# Allegro board D1_CORE.brd
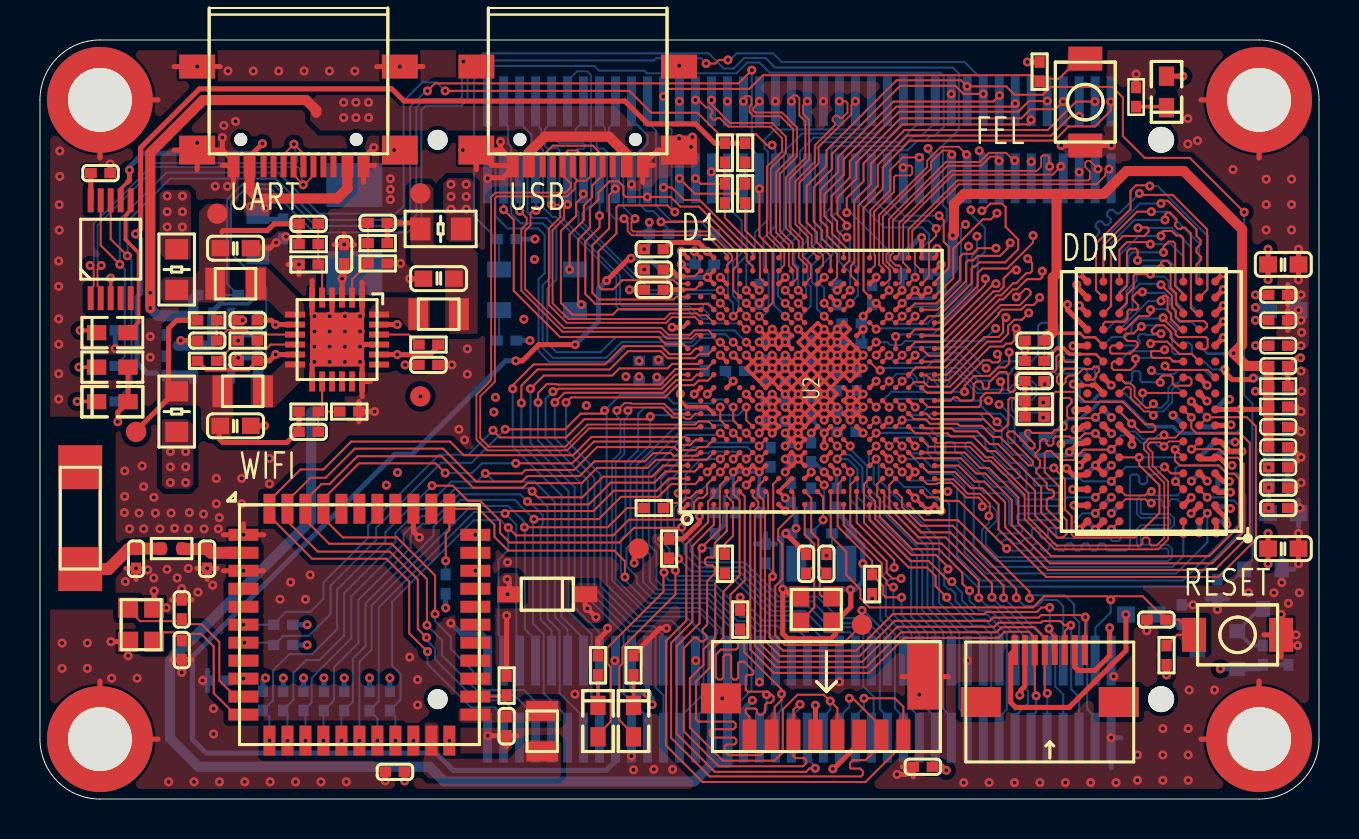
[diagram p0: board, top side]
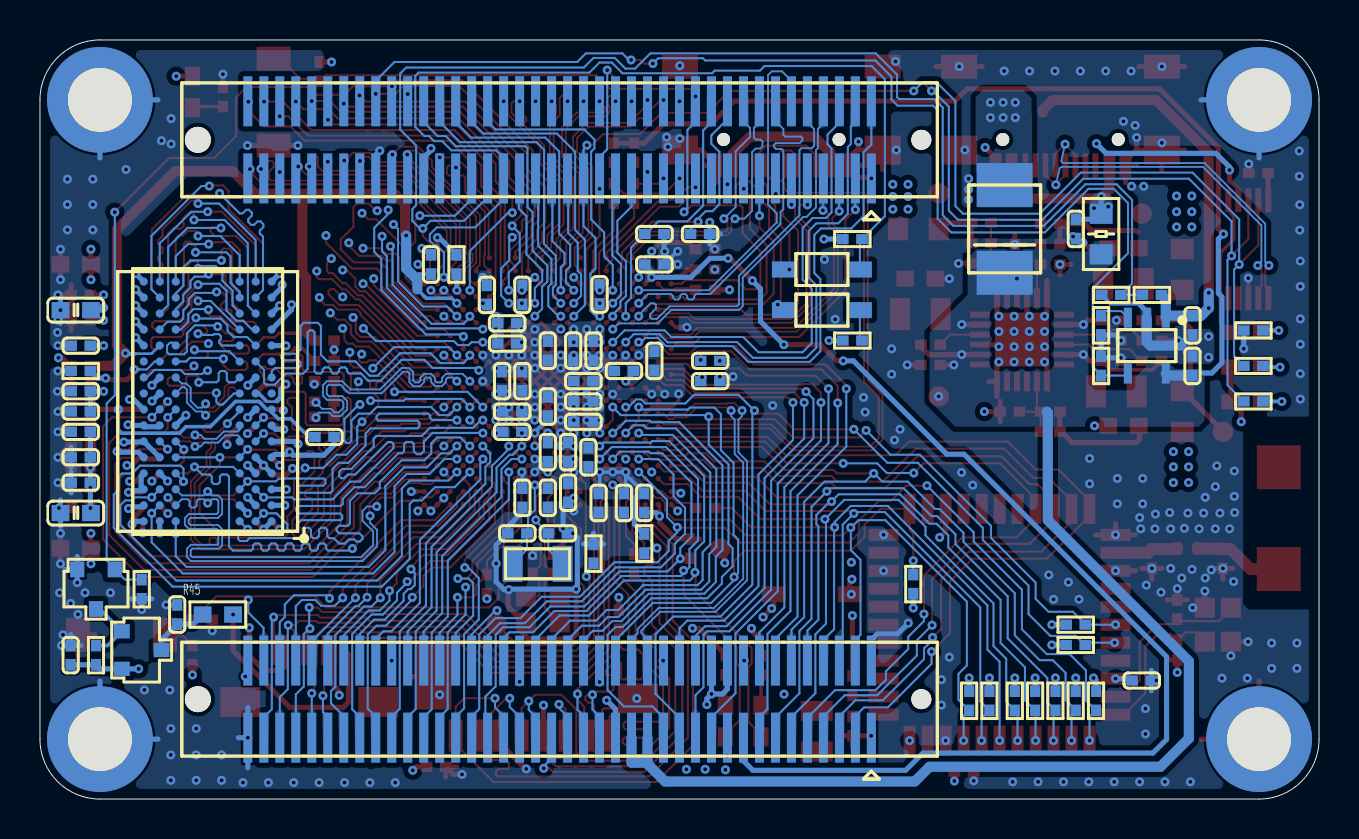
[diagram p1: board, bottom side, seen from below]

Outline 64 x 38 mm; copper layers: TOP, GND, POWER, BOTTOM. Coordinates in mm from the lower left corner of the outline.
Outline path: 0,35 0,3 arc(0.88,0.88) 3,0 61,0 arc(63.12,0.88) 64,3 64,35 arc(63.12,37.12) 61,38 3,38 arc(0.88,37.12) 0,35

## Design rules (mm)
constraint set DEFAULT: min track width 0.102
net group DSI_CK: nets DSI_CKN DSI_CKP
net group DSI_D0: nets DSI_DN0 DSI_DP0
net group DSI_D1: nets DSI_DN1 DSI_DP1
net group DSI_D2: nets DSI_DN2 DSI_DP2
net group DSI_D3: nets DSI_DN3 DSI_DP3
net group HDMI_0: nets HDMI_0N HDMI_0P
net group HDMI_1: nets HDMI_1N HDMI_1P
net group HDMI_2: nets HDMI_2N HDMI_2P
net group HDMI_C: nets HDMI_CN HDMI_CP
net group LINEOUTL: nets LINEOUTL_N LINEOUTL_P
net group MIC_IN1_C: nets MIC_IN1_C_N MIC_IN1_C_P
net group MIC_IN2_C: nets MIC_IN2_C_N MIC_IN2_C_P
net group MIC_IN3_C: nets MIC_IN3_C_N MIC_IN3_C_P
net group SDC0_CLK: nets N650031 SDC0_CLK
net group DDR_CTL: nets DDR_CKE0 DDR_CS0_B DDR_ODT0
net group DDR_DQS0: nets DDR_DQS0_N
net group DDR_DQS1: nets DDR_DQS1_N
net group POWER: nets V3 VERF VLDO_BOUT

## Placement (name value [footprint] x y rotation side)
C1  10uf  [C0402]  10.4 23.97 180 top
C2  10uf  [C0402]  15.22 27.27 90 top
C3  10uf  [C0402]  10.4 21.94 180 top
C4  10uf  [C0402]  19.44 21.73 0 top
C5  0.1uf  [C0402]  13.44 18.38 0 top
C6  22uf  [C0603]  9.79 18.68 0 top
C7  10uf  [C0402]  8.36 22.95 180 top
C8  0.1uf  [C0402]  13.44 28.79 0 top
C9  22uf  [C0603]  9.79 27.57 0 top
C10  0.1uf  [C0402]  16.9 28.84 180 top
C11  22uf  [C0603]  19.95 26.05 180 top
C12  12pf  [C0402]  38.08 13.3 0 bottom
C13  12pf  [C0402]  40.11 13.3 180 bottom
C14  12pf  [C0402]  38.34 11.78 270 top
C15  1uf  [C0402]  55.86 8.98 180 top
C16  12pf  [C0402]  39.35 11.78 270 top
C17  1uf  [C0402]  40.37 18.38 0 bottom
C18  10uf  [C0402]  30.46 20.92 180 bottom
C19  1uf  [C0402]  36.81 19.9 0 bottom
C20  10uf  [C0402]  36.56 17.11 90 bottom
C21  1uf  [C0402]  38.59 19.65 90 bottom
C22  1uf  [C0402]  36.81 18.89 0 bottom
C23  0.1uf  [C0402]  36.81 20.92 0 bottom
C24  10uf  [C0402]  30.46 21.94 180 bottom
C25  1uf  [C0402]  36.3 22.44 270 bottom
C26  1uf  [C0402]  37.57 15.33 270 bottom
C27  1uf  [C0402]  37.57 17.36 90 bottom
C28  1uf  [C0402]  38.59 17.36 270 bottom
C29  1uf  [C0402]  37.32 22.44 270 bottom
C30  0.1uf  [C0402]  38.59 22.44 270 bottom
C31  1uf  [C0402]  38.59 15.08 270 bottom
C32  1uf  [C0402]  36 25.26 90 bottom
C33  0.1uf  [C0402]  40.62 22.8 180 bottom
C34  0.1uf  [C0402]  61.96 21.68 180 top
C35  10uf  [C0402]  39.86 20.92 90 bottom
C36  1uf  [C0402]  40.88 20.92 90 bottom
C37  0.1uf  [C0402]  40.37 19.4 180 bottom
C38  0.1uf  [C0402]  61.96 17.62 0 top
C39  0.1uf  [C0402]  49.77 18.13 180 bottom
C40  0.1uf  [C0402]  44.43 26.76 90 bottom
C41  0.1uf  [C0402]  61.96 18.63 0 top
C42  0.1uf  [C0402]  49.77 22.95 180 top
C43  0.1uf  [C0402]  49.77 20.92 0 top
C44  22uf  [C0603]  62.21 14.32 0 bottom
C45  10uf  [C0603]  62.21 24.48 0 bottom
C46  1uf  [C0402]  61.96 22.7 0 bottom
C47  1uf  [C0402]  61.96 17.11 0 bottom
C48  1uf  [C0402]  61.96 15.84 0 bottom
C49  0.1uf  [C0402]  61.96 19.4 0 bottom
C50  0.1uf  [C0402]  61.96 18.38 0 bottom
C51  0.1uf  [C0402]  61.96 20.41 0 bottom
C52  22uf  [C0603]  62.21 26.76 0 top
C53  10uf  [C0603]  62.21 12.54 0 top
C54  1uf  [C0402]  61.96 25.24 0 top
C55  1uf  [C0402]  61.96 23.97 0 top
C56  1uf  [C0402]  61.96 14.57 0 top
C57  0.1uf  [C0402]  61.96 22.7 0 top
C58  0.1uf  [C0402]  61.96 16.6 0 top
C59  0.1uf  [C0402]  61.96 15.59 0 top
C60  0.1uf  [C0402]  33.76 14.82 270 bottom
C61  0.1uf  [C0402]  36.05 14.82 270 bottom
C62  0.1uf  [C0402]  34.78 14.82 270 bottom
C63  0.1uf  [C0402]  41.64 25.24 90 bottom
C64  0.1uf  [C0402]  40.62 23.82 180 bottom
C65  0.1uf  [C0402]  44.18 1.62 180 top
C66  0.1uf  [C0402]  39.86 15.08 270 bottom
C67  0.1uf  [C0402]  30.72 27.52 0 top
C68  1uf  [C0402]  33.26 26.76 0 bottom
C69  10uf  [C0402]  30.72 26.51 0 top
C70  1uf  [C0402]  30.72 25.49 0 top
C71  0.1uf  [C0402]  33.26 28.29 180 bottom
C72  0.1uf  [C0402]  33.26 21.94 90 bottom
C73  1uf  [C0402]  34.78 21.43 180 bottom
C74  0.1uf  [C0402]  30.97 28.29 180 bottom
C75  0.1uf  [C0402]  39.86 25.24 90 bottom
C76  1uf  [C0402]  62.47 7.2 90 bottom
C77  1uf  [C0402]  57.13 9.24 90 bottom
C78  0.1uf  [C0402]  6.33 21.68 270 bottom
C79  0.1uf  [C0402]  6.33 23.71 90 bottom
C80  0.1uf  [C0402]  12.17 28.54 90 bottom
C81  0.1uf  [C0402]  3.03 31.33 180 top
C82  10pf  [C0402]  8.36 12.03 90 top
C83  10pf  [C0402]  4.81 12.03 90 top
C84  1uf  [C0402]  17.76 1.36 0 top
C85  1uf  [C0402]  8.87 5.93 0 bottom
C86  1uf  [C0402]  23.35 3.65 90 top
C87  12pf  [C0402]  7.09 9.49 90 top
C88  12pf  [C0402]  7.09 7.46 270 top
D1  LED  [LED0603]  56.37 35.4 90 top
D2  DIODE  [SOD-123]  25.38 10.25 180 top
D3  SS24  [SMB-403A-03]  15.73 28.54 90 bottom
D4  LED  [LED0603]  27.92 3.9 270 top
D5  LED  [LED0603]  29.7 3.9 270 top
D6  DIODE  [SOD-123]  24.87 24.48 180 bottom
D7  DIODE  [SOD-123]  24.87 26.51 180 bottom
D8  LED  [LED0603]  3.62 21.62 0 top
D9  LED  [LED0603]  3.62 19.89 0 top
D10  LED  [LED0603]  3.62 23.35 0 top
J1  TP  [TEST-POINT]  4.81 18.38 0 top
J2  TP  [TEST-POINT]  8.87 29.3 0 top
J3  TP  [TEST-POINT]  19.03 30.32 0 top
J4  TP  [TEST-POINT]  19.03 20.16 0 top
J5  M3  [M3-PAD]  61 3 0 top
J6  M3  [M3-PAD]  61 35 0 top
J7  M3  [M3-PAD]  3 3 0 top
J8  TP  [TEST-POINT]  29.95 12.54 0 top
J9  M3  [M3-PAD]  3 35 0 top
J10  TP  [TEST-POINT]  41.13 8.73 0 top
J11  -  [TFCARD-SHORT-8P]  39.35 2.38 0 top
J12  USB-C-16P  [USB-C-16P-SMD]  26.91 36.67 180 top
J13  USB-C-16P  [USB-C-16P-SMD]  12.94 36.67 180 top
J15  HEADER 40x2  [BTB-80P-0P8MM-MALE]  38 33 270 bottom
J16  HEADER 40x2  [BTB-80P-0P8MM-MALE]  38 5 270 bottom
L1  1.5uh  [L0806]  10.14 20.41 180 top
L2  1.5uh  [L0806]  9.79 25.8 180 top
L3  1.5uh  [L0806]  19.95 24.27 0 top
L4  0  [L0402]  6.59 12.54 0 top
L5  1uh  [L0806]  25.13 3.39 90 top
NOREF  -  []  38 33 0 top
NOREF#2  -  []  38 33 90 top
NOREF#3  -  []  0 35 0 top
NOREF#4  -  []  61 0 90 top
NOREF#5  -  []  38 5 0 top
NOREF#6  -  []  38 5 90 top
Q1  pmos  [SOT-23]  58.91 7.46 90 bottom
Q2  nmos  [SOT-23]  61.2 10.51 180 bottom
R1  0  [R0805]  6.84 26.51 90 top
R2  0  [R0805]  20.05 28.54 0 top
R3  0  [R0805]  6.84 19.4 270 top
R4  10k  [R0402]  8.36 23.97 0 top
R5  68k  [R0402]  13.44 19.4 0 top
R6  15k  [R0402]  15.48 19.4 0 top
R7  2k  [R0402]  54.85 35.14 90 top
R8  100k  [R0402]  10.4 22.95 180 top
R9  10k  [R0402]  8.36 21.94 0 top
R10  10k  [R0402]  19.44 22.75 180 top
R11  10k  [R0402]  13.44 27.78 0 top
R12  20k  [R0402]  13.44 26.76 180 top
R13  25k  [R0402]  16.9 27.83 180 top
R14  0  [R0805]  10.9 28.29 270 bottom
R15  20k  [R0402]  16.9 26.81 0 top
R16  10k  [R0402]  41.64 10.76 90 top
R17  10k  [R0402]  50.02 36.41 270 top
R18  10k  [R0402]  56.37 7.2 90 top
R19  2k  [R0402]  61.96 20.67 180 top
R20  240  [R0402]  61.96 21.43 180 bottom
R21  240  [R0402]  49.77 21.94 0 top
R22  240  [R0402]  43.16 26.76 90 bottom
R23  2k  [R0402]  61.96 19.65 0 top
R26  50  [R0402]  49.77 19.9 180 top
R27  50  [R0402]  49.77 19.14 180 top
R28  22  [R0402]  30.72 14.57 180 top
R29  22  [R0402]  34.27 11.78 270 top
R30  10k  [R0402]  33.76 12.79 90 bottom
R31  100k  [R0402]  31.48 12.54 90 top
R32  100k  [R0402]  36.3 12.28 90 bottom
R37  1k  [R0402]  27.92 6.7 90 top
R38  1k  [R0402]  29.7 6.7 90 top
R39  470k  [R0402]  35.03 8.98 90 top
R40  10k  [R0402]  35.29 32.35 90 top
R41  10k  [R0402]  34.27 32.35 90 top
R42  100R  [R0402]  35.29 30.32 90 top
R43  100R  [R0402]  34.27 30.32 90 top
R44  25k  [R0402]  23.35 22.95 180 bottom
R45  10R  [R0603]  55.1 9.24 180 bottom
R46  100k  [R0402]  61.2 7.2 90 bottom
R47  100k  [R0402]  58.91 10.51 270 bottom
R48  10k  [R0402]  8.36 25.24 0 bottom
R49  DNP/4.7k  [R0402]  10.9 23.71 270 bottom
R50  10k  [R0402]  10.9 21.68 270 bottom
R51  15k  [R0402]  10.4 25.24 0 bottom
R52  47k  [R0402]  23.35 28.03 180 bottom
R53  1k  [R0402]  3.28 21.68 0 bottom
R54  1k  [R0402]  3.28 19.9 0 bottom
R55  1k  [R0402]  3.28 23.46 0 bottom
R56  47k  [R0402]  23.35 5.68 90 top
R57  47k  [R0402]  14.21 4.92 270 bottom
R58  47k  [R0402]  13.19 4.92 270 bottom
R59  47k  [R0402]  17.51 4.92 270 bottom
R60  47k  [R0402]  16.49 4.92 270 bottom
R61  47k  [R0402]  15.22 4.92 270 bottom
R62  10k  [R0402]  12.17 7.71 180 bottom
R63  10k  [R0402]  12.17 8.73 180 bottom
R64  10k  [R0402]  12.17 4.92 270 bottom
R65  10k  [R0402]  20.3 10.76 90 bottom
R66  10k  [R0402]  11.16 4.92 270 bottom
RF1  AN2051-245  [ANT-2051]  2.01 14.06 270 top
SW1  FEL  [BUTTON-3X4]  52.31 34.89 270 top
SW2  RESET  [BUTTON-3X4]  59.93 8.22 0 top
U1  EA3059C  [QFN24-0P5-4X4MM]  14.87 23 270 top
U2  D1-BGA337-0518  [BGA337P65B1300_1300H125]  38.59 20.92 90 top
U3  MT41K512M16  [DDR3-BGA96]  55.61 19.9 0 bottom
U4  MT41K512M16  [DDR3-BGA96]  55.61 19.9 180 top
U5  TFT-0P96-160X80-8P  [FPC8-0P5MM]  50.53 7.46 180 top
U6  LPW5206  [SOT23-5-0P95-2P8-1P6X2P9MM]  8.62 22.7 270 bottom
U7  CH340E  [MSOP10-0P5-3X3MM]  3.54 27.52 90 top
U8  -  [AP6212]  15.98 8.73 0 top
X1  24M  [CRYSTAL-2520]  38.84 9.49 0 top
X2  26M  [CRYSTAL-2520]  5.06 8.73 270 top
Y1  32.768k  [CRYSTAL-3215]  39.1 11.78 0 bottom

## Library data of the parts
C1-C88 = CAP NP
D1 D4 D5 D8-D10 = LED
D2 D3 D6 D7 = DIODE
J1-J10 = HEADER 1
J11 = TFCARD-SHORT-8P
J12 J13 = USB-C-16P
J15 J16 = HEADER 40x2
L1-L5 = INDUCTOR
Q1 = MOSFET P
Q2 = MOSFET N
R1-R23 R26-R28 R30-R32 R37-R66 = R
R29 = R: signal model: R_R0402_22_22
RF1 = ANT-2PORT
SW1 SW2 = SW PUSHBUTTON
U1 = EA3059C
U2 = D1-BGA337-0518
U3 U4 = MT41K512M16
U5 = TFT-0P96-160X80-8P
U6 = LPW5206
U7 = CH340E
U8 = AP6212
X1 X2 = XTAL-4
Y1 = XTAL

## Footprints (pads in the part's own frame, mm; a bottom-side part is the same pattern mirrored in y, then rotated)
ANT-2051
  rect 2.2x2.2 smd: 1(2.55,0) 2(-2.55,0)
AP6212
  rect 1.5x0.6 smd: 1(-5.802,4.5) 2(-5.802,3.6) 3(-5.802,2.7) 4(-5.802,1.8) 5(-5.802,0.9) 6(-5.802,0) 7(-5.802,-0.9) 8(-5.802,-1.8) 9(-5.802,-2.7) 10(-5.802,-3.6) 11(-5.802,-4.5) 23(5.802,-4.5) 24(5.802,-3.6) 25(5.802,-2.7) 26(5.802,-1.8) 27(5.802,-0.9) 28(5.802,0) 29(5.802,0.9) 30(5.802,1.8) 31(5.802,2.7) 32(5.802,3.6) 33(5.802,4.5)
  rect 0.6x1.5 smd: 12(-4.5,-5.802) 13(-3.6,-5.802) 14(-2.7,-5.802) 15(-1.8,-5.802) 16(-0.9,-5.802) 17(0,-5.802) 18(0.9,-5.802) 19(1.8,-5.802) 20(2.7,-5.802) 21(3.6,-5.802) 22(4.5,-5.802) 34(4.5,5.802) 35(3.6,5.802) 36(2.7,5.802) 37(1.8,5.802) 38(0.9,5.802) 39(0,5.802) 40(-0.9,5.802) 41(-1.8,5.802) 42(-2.7,5.802) 43(-3.6,5.802) 44(-4.5,5.802)
BGA337P65B1300_1300H125
  round 0.27 smd: A1(-6.175,6.175) A2(-5.525,6.175) A3(-4.875,6.175) A4(-4.225,6.175) A6(-2.925,6.175) A8(-1.625,6.175) A11(0.325,6.175) A13(1.625,6.175) A15(2.925,6.175) A17(4.225,6.175) A18(4.875,6.175) A19(5.525,6.175) A20(6.175,6.175) B1(-6.175,5.525) B2(-5.525,5.525) B3(-4.875,5.525) B4(-4.225,5.525) B5(-3.575,5.525) B6(-2.925,5.525) B7(-2.275,5.525) B8(-1.625,5.525) B9(-0.975,5.525) B10(-0.325,5.525) B11(0.325,5.525) B12(0.975,5.525) B13(1.625,5.525) B14(2.275,5.525) B15(2.925,5.525) B16(3.575,5.525) B17(4.225,5.525) B18(4.875,5.525) B19(5.525,5.525) B20(6.175,5.525) C1(-6.175,4.875) C2(-5.525,4.875) C3(-4.875,4.875) C4(-4.225,4.875) C5(-3.575,4.875) C6(-2.925,4.875) C7(-2.275,4.875) C8(-1.625,4.875) C9(-0.975,4.875) C10(-0.325,4.875) C11(0.325,4.875) C12(0.975,4.875) C13(1.625,4.875) C14(2.275,4.875) C15(2.925,4.875) C16(3.575,4.875) C17(4.225,4.875) C18(4.875,4.875) C19(5.525,4.875) C20(6.175,4.875) D1(-6.175,4.225) D2(-5.525,4.225) D3(-4.875,4.225) D4(-4.225,4.225) D5(-3.575,4.225) D6(-2.925,4.225) D7(-2.275,4.225) D9(-0.975,4.225) D10(-0.325,4.225) D12(0.975,4.225) D13(1.625,4.225) D15(2.925,4.225) D16(3.575,4.225) D17(4.225,4.225) D18(4.875,4.225) D19(5.525,4.225) D20(6.175,4.225) E2(-5.525,3.575) E3(-4.875,3.575) E4(-4.225,3.575) E5(-3.575,3.575) E6(-2.925,3.575) E7(-2.275,3.575) E9(-0.975,3.575) E10(-0.325,3.575) E12(0.975,3.575) E13(1.625,3.575) E15(2.925,3.575) E16(3.575,3.575) E17(4.225,3.575) E18(4.875,3.575) E19(5.525,3.575) F1(-6.175,2.925) F2(-5.525,2.925) F3(-4.875,2.925) F4(-4.225,2.925) F5(-3.575,2.925) F6(-2.925,2.925) F7(-2.275,2.925) F9(-0.975,2.925) F10(-0.325,2.925) F12(0.975,2.925) F13(1.625,2.925) F15(2.925,2.925) F16(3.575,2.925) F17(4.225,2.925) F18(4.875,2.925) F19(5.525,2.925) F20(6.175,2.925) G2(-5.525,2.275) G3(-4.875,2.275) G4(-4.225,2.275) G5(-3.575,2.275) G6(-2.925,2.275) G7(-2.275,2.275) G8(-1.625,2.275) G9(-0.975,2.275) G10(-0.325,2.275) G11(0.325,2.275) G12(0.975,2.275) G13(1.625,2.275) G14(2.275,2.275) G15(2.925,2.275) G16(3.575,2.275) G17(4.225,2.275) G18(4.875,2.275) G19(5.525,2.275) H1(-6.175,1.625) H2(-5.525,1.625) H3(-4.875,1.625) H7(-2.275,1.625) H8(-1.625,1.625) H9(-0.975,1.625) H10(-0.325,1.625) H11(0.325,1.625) H12(0.975,1.625) H13(1.625,1.625) H14(2.275,1.625) H18(4.875,1.625) H19(5.525,1.625) H20(6.175,1.625) J2(-5.525,0.975) J3(-4.875,0.975) J4(-4.225,0.975) J5(-3.575,0.975) J6(-2.925,0.975) J7(-2.275,0.975) J8(-1.625,0.975) J9(-0.975,0.975) J10(-0.325,0.975) J11(0.325,0.975) J12(0.975,0.975) J13(1.625,0.975) J14(2.275,0.975) J15(2.925,0.975) J16(3.575,0.975) J17(4.225,0.975) J18(4.875,0.975) J19(5.525,0.975) K1(-6.175,0.325) K2(-5.525,0.325) K3(-4.875,0.325) K4(-4.225,0.325) K5(-3.575,0.325) K6(-2.925,0.325) K7(-2.275,0.325) K8(-1.625,0.325) K9(-0.975,0.325) K10(-0.325,0.325) K11(0.325,0.325) K12(0.975,0.325) K13(1.625,0.325) K14(2.275,0.325) K15(2.925,0.325) K16(3.575,0.325) K17(4.225,0.325) K18(4.875,0.325) K19(5.525,0.325) L2(-5.525,-0.325) L3(-4.875,-0.325) L7(-2.275,-0.325) L8(-1.625,-0.325) L9(-0.975,-0.325) L10(-0.325,-0.325) L11(0.325,-0.325) L12(0.975,-0.325) L13(1.625,-0.325) L14(2.275,-0.325) L18(4.875,-0.325) L19(5.525,-0.325) L20(6.175,-0.325) M2(-5.525,-0.975) M3(-4.875,-0.975) M4(-4.225,-0.975) M5(-3.575,-0.975) M6(-2.925,-0.975) M7(-2.275,-0.975) M8(-1.625,-0.975) M9(-0.975,-0.975) M10(-0.325,-0.975) M11(0.325,-0.975) M12(0.975,-0.975) M13(1.625,-0.975) M14(2.275,-0.975) M15(2.925,-0.975) M16(3.575,-0.975) M17(4.225,-0.975) M18(4.875,-0.975) M19(5.525,-0.975) N1(-6.175,-1.625) N2(-5.525,-1.625) N3(-4.875,-1.625) N4(-4.225,-1.625) N5(-3.575,-1.625) N6(-2.925,-1.625) N7(-2.275,-1.625) N8(-1.625,-1.625) N9(-0.975,-1.625) N10(-0.325,-1.625) N11(0.325,-1.625) N12(0.975,-1.625) N13(1.625,-1.625) N14(2.275,-1.625) N15(2.925,-1.625) N16(3.575,-1.625) N17(4.225,-1.625) N18(4.875,-1.625) N19(5.525,-1.625) N20(6.175,-1.625) P2(-5.525,-2.275) P3(-4.875,-2.275) P7(-2.275,-2.275) P8(-1.625,-2.275) P9(-0.975,-2.275) P10(-0.325,-2.275) P11(0.325,-2.275) P12(0.975,-2.275) P13(1.625,-2.275) P14(2.275,-2.275) P18(4.875,-2.275) P19(5.525,-2.275) R1(-6.175,-2.925) R2(-5.525,-2.925) R3(-4.875,-2.925) R4(-4.225,-2.925) R5(-3.575,-2.925) R6(-2.925,-2.925) R7(-2.275,-2.925) R9(-0.975,-2.925) R10(-0.325,-2.925) R12(0.975,-2.925) R13(1.625,-2.925) R15(2.925,-2.925) R16(3.575,-2.925) R17(4.225,-2.925) R18(4.875,-2.925) R19(5.525,-2.925) R20(6.175,-2.925) T2(-5.525,-3.575) T3(-4.875,-3.575) T4(-4.225,-3.575) T5(-3.575,-3.575) T6(-2.925,-3.575) T7(-2.275,-3.575) T9(-0.975,-3.575) T10(-0.325,-3.575) T12(0.975,-3.575) T13(1.625,-3.575) T15(2.925,-3.575) T16(3.575,-3.575) T17(4.225,-3.575) T18(4.875,-3.575) T19(5.525,-3.575) U1(-6.175,-4.225) U2(-5.525,-4.225) U3(-4.875,-4.225) U4(-4.225,-4.225) U5(-3.575,-4.225) U6(-2.925,-4.225) U7(-2.275,-4.225) U9(-0.975,-4.225) U10(-0.325,-4.225) U12(0.975,-4.225) U13(1.625,-4.225) U15(2.925,-4.225) U16(3.575,-4.225) U17(4.225,-4.225) U18(4.875,-4.225) U19(5.525,-4.225) U20(6.175,-4.225) V1(-6.175,-4.875) V2(-5.525,-4.875) V3(-4.875,-4.875) V4(-4.225,-4.875) V5(-3.575,-4.875) V6(-2.925,-4.875) V7(-2.275,-4.875) V8(-1.625,-4.875) V9(-0.975,-4.875) V10(-0.325,-4.875) V11(0.325,-4.875) V12(0.975,-4.875) V13(1.625,-4.875) V14(2.275,-4.875) V15(2.925,-4.875) V16(3.575,-4.875) V17(4.225,-4.875) V18(4.875,-4.875) V19(5.525,-4.875) V20(6.175,-4.875) W1(-6.175,-5.525) W2(-5.525,-5.525) W3(-4.875,-5.525) W4(-4.225,-5.525) W5(-3.575,-5.525) W6(-2.925,-5.525) W7(-2.275,-5.525) W8(-1.625,-5.525) W9(-0.975,-5.525) W10(-0.325,-5.525) W11(0.325,-5.525) W12(0.975,-5.525) W13(1.625,-5.525) W14(2.275,-5.525) W15(2.925,-5.525) W16(3.575,-5.525) W17(4.225,-5.525) W18(4.875,-5.525) W19(5.525,-5.525) W20(6.175,-5.525) Y1(-6.175,-6.175) Y2(-5.525,-6.175) Y3(-4.875,-6.175) Y4(-4.225,-6.175) Y6(-2.925,-6.175) Y8(-1.625,-6.175) Y9(-0.975,-6.175) Y11(0.325,-6.175) Y13(1.625,-6.175) Y15(2.925,-6.175) Y17(4.225,-6.175) Y18(4.875,-6.175) Y19(5.525,-6.175) Y20(6.175,-6.175)
BTB-80P-0P8MM-MALE
  round 1.3 hole 1.3 unplated: (0,-18.1)
  round 1 hole 1 unplated: (0,18.1)
  rect 2.5x0.45 smd: 1(1.93,15.6) 2(-1.93,15.6) 3(1.93,14.8) 4(-1.93,14.8) 5(1.93,14) 6(-1.93,14) 7(1.93,13.2) 8(-1.93,13.2) 9(1.93,12.4) 10(-1.93,12.4) 11(1.93,11.6) 12(-1.93,11.6) 13(1.93,10.8) 14(-1.93,10.8) 15(1.93,10) 16(-1.93,10) 17(1.93,9.2) 18(-1.93,9.2) 19(1.93,8.4) 20(-1.93,8.4) 21(1.93,7.6) 22(-1.93,7.6) 23(1.93,6.8) 24(-1.93,6.8) 25(1.93,6) 26(-1.93,6) 27(1.93,5.2) 28(-1.93,5.2) 29(1.93,4.4) 30(-1.93,4.4) 31(1.93,3.6) 32(-1.93,3.6) 33(1.93,2.8) 34(-1.93,2.8) 35(1.93,2) 36(-1.93,2) 37(1.93,1.2) 38(-1.93,1.2) 39(1.93,0.4) 40(-1.93,0.4) 41(1.93,-0.4) 42(-1.93,-0.4) 43(1.93,-1.2) 44(-1.93,-1.2) 45(1.93,-2) 46(-1.93,-2) 47(1.93,-2.8) 48(-1.93,-2.8) 49(1.93,-3.6) 50(-1.93,-3.6) 51(1.93,-4.4) 52(-1.93,-4.4) 53(1.93,-5.2) 54(-1.93,-5.2) 55(1.93,-6) 56(-1.93,-6) 57(1.93,-6.8) 58(-1.93,-6.8) 59(1.93,-7.6) 60(-1.93,-7.6) 61(1.93,-8.4) 62(-1.93,-8.4) 63(1.93,-9.2) 64(-1.93,-9.2) 65(1.93,-10) 66(-1.93,-10) 67(1.93,-10.8) 68(-1.93,-10.8) 69(1.93,-11.6) 70(-1.93,-11.6) 71(1.93,-12.4) 72(-1.93,-12.4) 73(1.93,-13.2) 74(-1.93,-13.2) 75(1.93,-14) 76(-1.93,-14) 77(1.93,-14.8) 78(-1.93,-14.8) 79(1.93,-15.6) 80(-1.93,-15.6)
BUTTON-3X4
  rect 1.2x1.7 smd: 1(-2.175,0) 2(2.175,0)
C0402
  rect 0.584x0.508 smd: 1(-0.483,0) 2(0.483,0)
C0603
  rect 0.889x0.813 smd: 1(-0.762,0) 2(0.762,0)
CRYSTAL-2520
  rect 1x1 smd: 1(-0.85,-0.65) 2(0.85,-0.65) 3(0.85,0.65) 4(-0.85,0.65)
CRYSTAL-3215
  rect 1x1.8 smd: 1(-1.25,0) 2(1.25,0)
DDR3-BGA96
  round 0.4 smd: A1(-3.2,6) A2(-2.4,6) A3(-1.6,6) A7(1.6,6) A8(2.4,6) A9(3.2,6) B1(-3.2,5.2) B2(-2.4,5.2) B3(-1.6,5.2) B7(1.6,5.2) B8(2.4,5.2) B9(3.2,5.2) C1(-3.2,4.4) C2(-2.4,4.4) C3(-1.6,4.4) C7(1.6,4.4) C8(2.4,4.4) C9(3.2,4.4) D1(-3.2,3.6) D2(-2.4,3.6) D3(-1.6,3.6) D7(1.6,3.6) D8(2.4,3.6) D9(3.2,3.6) E1(-3.2,2.8) E2(-2.4,2.8) E3(-1.6,2.8) E7(1.6,2.8) E8(2.4,2.8) E9(3.2,2.8) F1(-3.2,2) F2(-2.4,2) F3(-1.6,2) F7(1.6,2) F8(2.4,2) F9(3.2,2) G1(-3.2,1.2) G2(-2.4,1.2) G3(-1.6,1.2) G7(1.6,1.2) G8(2.4,1.2) G9(3.2,1.2) H1(-3.2,0.4) H2(-2.4,0.4) H3(-1.6,0.4) H7(1.6,0.4) H8(2.4,0.4) H9(3.2,0.4) J1(-3.2,-0.4) J2(-2.4,-0.4) J3(-1.6,-0.4) J7(1.6,-0.4) J8(2.4,-0.4) J9(3.2,-0.4) K1(-3.2,-1.2) K2(-2.4,-1.2) K3(-1.6,-1.2) K7(1.6,-1.2) K8(2.4,-1.2) K9(3.2,-1.2) L1(-3.2,-2) L2(-2.4,-2) L3(-1.6,-2) L7(1.6,-2) L8(2.4,-2) L9(3.2,-2) M1(-3.2,-2.8) M2(-2.4,-2.8) M3(-1.6,-2.8) M7(1.6,-2.8) M8(2.4,-2.8) M9(3.2,-2.8) N1(-3.2,-3.6) N2(-2.4,-3.6) N3(-1.6,-3.6) N7(1.6,-3.6) N8(2.4,-3.6) N9(3.2,-3.6) P1(-3.2,-4.4) P2(-2.4,-4.4) P3(-1.6,-4.4) P7(1.6,-4.4) P8(2.4,-4.4) P9(3.2,-4.4) R1(-3.2,-5.2) R2(-2.4,-5.2) R3(-1.6,-5.2) R7(1.6,-5.2) R8(2.4,-5.2) R9(3.2,-5.2) T1(-3.2,-6) T2(-2.4,-6) T3(-1.6,-6) T7(1.6,-6) T8(2.4,-6) T9(3.2,-6)
FPC8-0P5MM
  rect 2x1.5 smd: (-3.45,2.6) (3.45,2.6)
  rect 0.3x1.5 smd: 1(1.75,0) 2(1.25,0) 3(0.75,0) 4(0.25,0) 5(-0.25,0) 6(-0.75,0) 7(-1.25,0) 8(-1.75,0)
L0402
  rrect 0.508x0.635 smd: 1(-0.508,0) 2(0.508,0)
L0806
  rect 1x1.6 smd: 1(-1.016,0) 2(1.016,0)
LED0603
  rect 0.965x0.762 smd: 1(-0.787,0) 2(0.787,0)
M3-PAD
  round 5.3 hole 3.2: 1(0,0)
MSOP10-0P5-3X3MM
  rect 1.2x0.3 smd: 1(-2.45,1) 2(-2.45,0.5) 3(-2.45,0) 4(-2.45,-0.5) 5(-2.45,-1) 6(2.45,-1) 7(2.45,-0.5) 8(2.45,0) 9(2.45,0.5) 10(2.45,1)
QFN24-0P5-4X4MM
  rect 1x0.3 smd: 1(-2.1,1.25) 2(-2.1,0.75) 3(-2.1,0.25) 4(-2.1,-0.25) 5(-2.1,-0.75) 6(-2.1,-1.25) 13(2.1,-1.25) 14(2.1,-0.75) 15(2.1,-0.25) 16(2.1,0.25) 17(2.1,0.75) 18(2.1,1.25)
  rect 0.3x1 smd: 7(-1.25,-2.1) 8(-0.75,-2.1) 9(-0.25,-2.1) 10(0.25,-2.1) 11(0.75,-2.1) 12(1.25,-2.1) 19(1.25,2.1) 20(0.75,2.1) 21(0.25,2.1) 22(-0.25,2.1) 23(-0.75,2.1) 24(-1.25,2.1)
  rect 2.7x2.7 smd: 25(0,0)
R0402
  rect 0.584x0.508 smd: 1(-0.483,0) 2(0.483,0)
R0603
  rect 0.889x0.813 smd: 1(-0.762,0) 2(0.762,0)
R0805
  rect 1.016x1.143 smd: 1(-1.016,0) 2(1.016,0)
SMB-403A-03
  rect 2.2x2.8 smd: 1(-2.2,0) 2(2.2,0)
SOD-123
  rect 1.2x0.8 smd: 1(-1.9,0) 2(1.9,0)
SOT23-5-0P95-2P8-1P6X2P9MM
  rect 1x0.4 smd: 1(-1.4,0.95) 2(-1.4,0) 3(-1.4,-0.95) 4(1.4,-0.95) 5(1.4,0.95)
SOT-23
  rect 0.711x0.787 smd: 1(0.94,0.991) 2(-0.94,0.991) 3(0,-0.991)
TEST-POINT
  round 1.016 smd: 1(0,0)
TFCARD-SHORT-8P
  rect 0.7x1.6 smd: 1(-3.85,0.8) 2(-2.75,0.8) 3(-1.65,0.8) 4(-0.55,0.8) 5(0.55,0.8) 6(1.65,0.8) 7(2.75,0.8) 8(3.85,0.8)
  rect 2x1.5 smd: 9(-5.28,2.66)
  rect 1.8x3.3 smd: 10(4.95,3.75)
USB-C-16P-SMD
  round 0.65 hole 0.65 unplated: (-2.89,3.65) (2.89,3.65)
  rect 1.8x1.45 smd: 13(-5.07,4.18) 14(5.07,4.18)
  rect 1.8x1.2 smd: 15(-5.07,0) 16(5.07,0)
  rect 0.6x1.2 smd: A1B12(-3.25,4.945) A4B9(-2.45,4.945) B1A12(3.25,4.945) B4A9(2.45,4.945)
  rect 0.3x1.2 smd: A5(-1.25,4.945) A6(-0.25,4.945) A7(0.25,4.945) A8(1.25,4.945) B5(1.75,4.945) B6(0.75,4.945) B7(-0.75,4.945) B8(-1.75,4.945)

## Nets
GND: C1.2 C2.2 C3.2 C4.2 C6.2 C7.2 C9.2 C11.2 C12.1 C13.1 C14.1 C15.2 C16.1 C17.2 C18.2 C19.2 C20.2 C21.2 C22.2 C23.2 C24.2 C25.2 C26.2 C27.2 C28.2 C29.2 C30.2 C31.2 C32.2 C33.2 C35.2 C36.2 C37.2 C38.2 C39.2 C40.2 C41.2 C42.2 C43.2 C44.2 C45.2 C46.2 C47.2 C48.2 C49.2 C50.2 C51.2 C52.2 C53.2 C54.2 C55.2 C56.2 C57.2 C58.2 C59.2 C60.2 C61.2 C62.2 C63.2 C64.2 C65.2 C66.2 C67.1 C68.1 C69.1 C70.1 C71.2 C72.1 C73.1 C74.2 C75.2 C76.2 C77.2 C78.1 C79.1 C80.1 C81.1 C82.1 C83.1 C84.1 C85.1 C86.1 C87.2 C88.2 J5.1 J6.1 J7.1 J9.1 J11.6(VSS) J11.9 J11.10 J12.13 J12.14 J12.15 J12.16 J12.A1B12 J12.B1A12 J13.13 J13.14 J13.15 J13.16 J13.A1B12 J13.B1A12 J15.1 J15.19 J15.26 J15.29 J15.32 J15.38 J15.44 J15.57 J15.60 J15.63 J15.69 J15.75 J16.1 J16.2 J16.18 J16.19 J16.28 J16.33 J16.36 J16.46 J16.62 J16.79 J16.80 Q2.2(SOURCE) R6.2 R7.2 R8.2 R12.2 R15.2 R20.1 R21.1 R22.2 R23.2 R31.2 R32.2 R37.2 R38.2 R39.2 R47.2 R49.2 R50.1 R51.2 R55.2 R56.2 SW1.2 SW2.2 U1.1 U1.4 U1.6 U1.13 U1.18 U1.21 U1.25 U2.A1 U2.A2 U2.A15 U2.A19 U2.A20 U2.B1 U2.B10 U2.B20 U2.C4 U2.C8 U2.C10 U2.D18 U2.E5 U2.F3 U2.F9 U2.F12 U2.F18 U2.G10 U2.G11 U2.G12 U2.H1 U2.H2 U2.H10 U2.H11 U2.H12 U2.H18 U2.J3 U2.J6 U2.J7 U2.J8 U2.J9 U2.J10 U2.J11 U2.J12 U2.K3 U2.K6 U2.K7 U2.K8 U2.K9 U2.K10 U2.K11 U2.K12 U2.K13 U2.K14 U2.L8 U2.L9 U2.L10 U2.L11 U2.L12 U2.L13 U2.L14 U2.L18 U2.M3 U2.M5 U2.M8 U2.M9 U2.M10 U2.M11 U2.M12 U2.M13 U2.M14 U2.N11 U2.N12 U2.N13 U2.N14 U2.N15 U2.N18 U2.P7 U2.P11 U2.P12 U2.P13 U2.R10 U2.R18 U2.T5 U2.T7 U2.T13 U2.V2 U2.V3 U2.V4 U2.V6 U2.V9 U2.V12 U2.V15 U2.V17 U2.W1 U2.W17 U2.W20 U2.Y1 U2.Y2 U2.Y19 U2.Y20 U3.A9 U3.B1 U3.B3 U3.B9 U3.D1 U3.D8 U3.E1 U3.E2 U3.E8 U3.F9 U3.G1 U3.G8 U3.G9 U3.J2 U3.J8 U3.M1 U3.M9 U3.P1 U3.P9 U3.T1 U3.T9 U4.A9 U4.B1 U4.B3 U4.B9 U4.D1 U4.D8 U4.E1 U4.E2 U4.E8 U4.F9 U4.G1 U4.G8 U4.G9 U4.J2 U4.J8 U4.M1 U4.M9 U4.P1 U4.P9 U4.T1 U4.T9 U5.2 U6.2 U7.3 U8.1 U8.3 U8.20 U8.31 U8.33 U8.36 X1.2 X1.4 X2.2 X2.4
V3: C81.2 U7.10
VBUS_5VIN: C80.2 J13.A4B9 J13.B4A9(VBUS2) R14.1 U7.7(VCC)
VCC_0V9_2A: C8.1 C9.1 J2.1 L2.2 R1.1 R11.1
VCC_1V8: C20.1 C26.1 C27.1 C28.1 C31.1 C33.1 C64.1 C75.1 J8.1 U2.J4 U2.J5 U2.K4 U2.K5 U2.L7 U2.M17 U2.P14 U2.R16
VCC_1V35_2A: C10.1 C11.1 J3.1 L3.2 R2.1 R13.1
VCC_3V3: C32.1 C60.1 C61.1 C62.1 C63.1 C65.1 C66.1 C67.2 C72.2 C76.1 C84.2 C85.2 D1.2 D2.2 D8.2 D9.2 J11.4 J16.20 J16.22 Q1.2(SOURCE) R3.2 R16.1 R17.1 R18.1 R30.2 R44.1 R46.1 R52.1 R57.1 R58.1 R59.1 R60.1 R61.1 R62.1 R63.1 R64.1 R65.1 R66.1 U2.C20 U2.D12 U2.E4 U2.F4(VCC-PF) U2.G4 U2.G17 U2.M4 U2.T16 U5.7(VDD) U8.9 U8.22
VCC_3V3_2A: C5.1 C6.1 J1.1 L1.2 R3.1 R4.1 R5.1
VCC_CPU: C18.1 C19.1 C22.1 C23.1 C24.1 C25.1 C29.1 C30.1 R1.2 U2.G7 U2.G8 U2.G9 U2.G13 U2.G14 U2.H7 U2.H8 U2.H9 U2.H13 U2.H14 U2.J13 U2.J14
VCC_DDR: C34.1 C35.1 C36.1 C37.1 C44.1 C45.1 C46.1 C47.1 C48.1 C49.1 C50.1 C51.1 C52.1 C53.1 C54.1 C55.1 C56.1 C57.1 C58.1 C59.1 R2.2 R19.1 U2.N8 U2.N9 U2.N10 U2.P8 U2.P9 U2.P10 U3.A1 U3.A8 U3.B2 U3.C1 U3.C9 U3.D2 U3.D9 U3.E9 U3.F1 U3.G7 U3.H2 U3.H9 U3.K2 U3.K8 U3.N1 U3.N9 U3.R1 U3.R9 U4.A1 U4.A8 U4.B2 U4.C1 U4.C9 U4.D2 U4.D9 U4.E9 U4.F1 U4.G7 U4.H2 U4.H9 U4.K2 U4.K8 U4.N1 U4.N9 U4.R1 U4.R9
VCC_LDO_IN: C21.1 D2.1(K) U2.M7
ALDO: C68.2 J16.17 U2.C18 U2.C19
BL_PWM: J15.62 Q2.1 R47.1 U2.M19
BT_HOST_WAKE: J16.25 R62.2 U2.E7 U8.7
BT_RST_N: J16.34 R65.2 U2.D7 U8.34
BT_WAKE: J16.27 R63.2 U2.F7 U8.6
DDR_A0: U2.V11 U3.N3 U4.N3
DDR_A1: U2.W13 U3.P7 U4.P7
DDR_A2: U2.V13 U3.P3 U4.P3
DDR_A3: U2.V14 U3.N2 U4.N2
DDR_A4: U2.T15 U3.P8 U4.P8
DDR_A5: U2.R15 U3.P2 U4.P2
DDR_A6: U2.U13 U3.R8 U4.R8
DDR_A7: U2.W15 U3.R2 U4.R2
DDR_A8: U2.U15 U3.T8 U4.T8
DDR_A9: U2.V16 U3.R3 U4.R3
DDR_A10: U2.R9 U3.L7 U4.L7
DDR_A11: U2.Y13 U3.R7 U4.R7
DDR_A12: U2.W12 U3.N7 U4.N7
DDR_A13: U2.Y15 U3.T3 U4.T3
DDR_A14: U2.W16 U3.T7 U4.T7
DDR_A15: U2.Y11 U3.M7 U4.M7
DDR_BA0: U2.W11 U3.M2 U4.M2
DDR_BA1: U2.W14 U3.N8 U4.N8
DDR_BA2: U2.V10 U3.M3 U4.M3
DDR_CAS_B: U2.T9 U3.K3 U4.K3
DDR_CK_N: R27.1 U2.U10 U3.K7 U4.K7
DDR_CK_P: R26.1 U2.T10 U3.J7 U4.J7
DDR_CKE0: U2.W9 U3.K9
DDR_CKE1: U2.Y9 U4.K9
DDR_CS0_B: U2.R12 U3.L2
DDR_CS1_B: U2.R13 U4.L2
DDR_D0: U2.W5 U3.F7 U4.E3
DDR_D1: U2.V7 U3.E3 U4.F7
DDR_D2: U2.V5 U3.F8 U4.F2
DDR_D3: U2.W7 U3.F2 U4.F8
DDR_D4: U2.Y4 U3.H7 U4.H3
DDR_D5: U2.V8 U3.G2 U4.H8
DDR_D6: U2.W4 U3.H8 U4.G2
DDR_D7: U2.W8 U3.H3 U4.H7
DDR_D8: U2.U7 U3.C3 U4.D7
DDR_D9: U2.T4 U3.D7 U4.C3
DDR_D10: U2.R7 U3.C2 U4.C8
DDR_D11: U2.U4 U3.C8 U4.C2
DDR_D12: U2.T6 U3.A3 U4.A7
DDR_D13: U2.U5 U3.B8 U4.A2
DDR_D14: U2.R6 U3.A2 U4.B8
DDR_D15: U2.U6 U3.A7 U4.A3
DDR_DQM0: U2.Y8 U3.E7 U4.E7
DDR_DQM1: U2.W2 U3.D3 U4.D3
DDR_DQS0_N: U2.Y6 U3.G3 U4.G3
DDR_DQS0_P: U2.W6 U3.F3 U4.F3
DDR_DQS1_N: U2.Y3 U3.B7 U4.B7
DDR_DQS1_P: U2.W3 U3.C7 U4.C7
DDR_ODT0: U2.T12 U3.K1
DDR_ODT1: U2.U12 U4.K1
DDR_RAS_B: U2.U9 U3.J3 U4.J3
DDR_RST: U2.Y17 U3.T2 U4.T2
DDR_WE_B: U2.W10 U3.L3 U4.L3
DSI_CKN: J15.65 U2.U18
DSI_CKP: J15.67 U2.U19
DSI_DN0: J15.77 U2.V20
DSI_DN1: J15.71 U2.U20
DSI_DN2: J15.59 U2.T18
DSI_DN3: J15.53 U2.R19
DSI_DP0: J15.79 U2.W19
DSI_DP1: J15.73 U2.V19
DSI_DP2: J15.61 U2.T19
DSI_DP3: J15.55 U2.R20
FEL: J15.24 R17.2 SW1.1 U2.A18
GPADC0: J16.15 U2.C13
GPADC1: J16.14 U2.B13
HBIAS: C74.1 J15.20 U2.E17
HDMI_0N: J15.40 U2.K19
HDMI_0P: J15.42 U2.K18
HDMI_1N: J15.34 U2.J19
HDMI_1P: J15.36 U2.J18
HDMI_2N: J15.28 U2.H20
HDMI_2P: J15.30 U2.H19
HDMI_5V: C1.1 C2.1 C3.1 C4.1 C78.2 D3.1(K) J4.1 J16.29 J16.31 R9.1 R10.1 R14.2 R40.2 R41.2 U1.3 U1.8 U1.11 U1.20 U1.23(VIN3) U6.5
HDMI_CEC: D6.1(K) J15.21 U2.F19
HDMI_CN: J15.46 U2.L20
HDMI_CP: J15.48 U2.L19
HDMI_HPD: J15.23 U2.F20
HDMI_SCL: J15.25 R40.1 R42.2
HDMI_SCL_R: R42.1 U2.G19
HDMI_SDA: J15.27 R41.1 R43.2
HDMI_SDA_R: R43.1 U2.G18
HP_DET: J15.3 U2.A13
HPLDO: C73.2 U2.D10 U2.E12
HPOUTFB: J15.4 U2.E13
HPOUTL: J15.6 U2.F13
HPOUTR: J15.2 U2.D13
LINEINL: J15.13 U2.B16
LINEINR: J15.15 U2.C16
LINEOUTL_N: J15.11 U2.C15
LINEOUTL_P: J15.9 U2.B15
LINEOUTR_N: J15.7 U2.C14
LINEOUTR_P: J15.5 U2.B14
LRADC: J16.16 U2.B12
MBIAS: C71.1 J15.22 U2.E16
MIC_DET: J15.17 U2.A17
MIC_IN1_C_N: J15.18 U2.D19
MIC_IN1_C_P: J15.16 U2.D20
MIC_IN2_C_N: J15.10 U2.D15
MIC_IN2_C_P: J15.8 U2.E15
MIC_IN3_C_N: J15.14 U2.D16
MIC_IN3_C_P: J15.12 U2.D17
NMI: J16.56 R16.2 U2.N3
OTG_5VIN: C79.2 D3.2 J12.A4B9 J12.B4A9(VBUS2) R48.1 U6.1(OUT)
OTG_PWRDET: J15.49 R48.2 R51.1 U2.W18
OTG_PWRDRV: J15.64 R50.2 U2.M18 U6.4
PB0: J15.39 U2.J16
PB1: J15.54 U2.J17
PB2: J15.45 U2.M16
PB3: J15.58 U2.M15
PB4: J15.56 U2.K16
PB5: J15.43 U2.K15
PB6: J15.41 U2.K17
PB7: J15.52 U2.J15
PB10: J15.50 U2.F17
PB11: J15.31 U2.F15
PB12: J15.33 U2.F16
PC5: J16.49 R31.1 U2.F5
PC6: D4.2 J16.44 U2.G6
PC7: D5.2 J16.48 U2.G5
PD22: J15.51 U2.Y18
PE0: J16.76 U2.V1
PE1: J16.72 U2.U1
PE2: J16.74 U2.U2
PE3: J16.70 U2.U3
PE4: J16.67 U2.T2
PE5: J16.68 U2.T3
PE6: J16.65 U2.R1
PE7: J16.66 U2.R2
PE8: J16.63 U2.R3
PE9: J16.53 U2.P2
PE10: J16.54 U2.P3
PE11: J16.55 U2.N1
PE12: J16.61 U2.R5
PE13: J16.64 U2.R4
PE14: J16.57 U2.N4
PE15: J16.58 U2.N5
PE16: J16.60 U2.N6
PE17: J16.59 U2.M6
PG12: J16.50 U2.D5
PG13: J16.42 U2.D6
PG14: J16.40 U2.E6
PG15: J16.38 U2.F6
PWM0: J15.66 U2.N20
PWM1: J15.68 U2.N19
REFCLK_OUT: J10.1 J16.52 U2.J2
RESET: C15.1 J16.78 R18.2 SW2.1 U2.M2
SDC0_CLK: J11.5 J16.43 R29.2
SDC0_CMD: J11.3 J16.39 U2.D1
SDC0_D0: J11.7 J16.45 U2.C1
SDC0_D1: J11.8 J16.47 U2.C2
SDC0_D2: J11.1 J16.35 U2.E2
SDC0_D3: J11.2 J16.37 R39.1 U2.E3
SDC0_DET: J16.41 R30.1 U2.D3
SDC1_CLK: J16.8 R28.2 U8.17
SDC1_CMD: J16.11 R61.2 U2.B3 U8.16
SDC1_D0: J16.6 R60.2 U2.A3 U8.18
SDC1_D1: J16.4 R59.2 U2.C3 U8.19
SDC1_D2: J16.13 R58.2 U2.A4 U8.14
SDC1_D3: J16.10 R57.2 U2.B4 U8.15
SPI1_CLK: J15.80 U2.R17
SPI1_CS: J15.70 U2.T17
SPI1_HOLD: J15.74 U2.N17
SPI1_MISO: J15.78 U2.P18
SPI1_MOSI: J15.76 U2.P19
SPI1_WP: J15.72 U2.N16
TFT_CLK: J16.75 U2.G3 U5.6
TFT_CS: J16.77 U2.G2 U5.8
TFT_DI: J16.73 R32.1 U2.H3 U5.5
TFT_RESET: J16.69 U2.F1 U5.3
TFT_RS: J16.71 U2.F2 U5.4
TP_X1: J16.21 U2.C12
TP_X2: J16.23 U2.A11
TP_Y1: J16.24 U2.B11
TP_Y2: J16.26 U2.C11
UART0_RX: J15.35 R54.2 U2.G16 U7.8
UART0_TX: J15.37 R53.2 U2.G15 U7.9
UART1_CTS: J16.9 U2.B6 U8.41
UART1_RTS: J16.3 U2.A6 U8.44
UART1_RX: J16.7 U2.C5 U8.42
UART1_TX: J16.5 U2.B5 U8.43
USB0_DM: J12.A7 J12.B7 U2.C7
USB0_DP: J12.A6 J12.B6 U2.B7
USB1_DM: J16.32 U2.B8
USB1_DP: J16.30 U2.A8
USB_C_CC: D7.1(K) J12.A5 J12.B5
USB_ID: D7.2 J15.47 R52.2 U2.V18
USB_UART_DN: J13.A7 J13.B7 U7.2
USB_UART_DP: J13.A6 J13.B6 U7.1
VERF: C34.2 C38.1 C39.1 C40.1 C41.1 C42.1 R19.2 R23.1 U2.U16 U3.H1 U3.M8 U4.H1 U4.M8
VLDO_BOUT: C17.1 U2.N7
WIFI_HOST_WAKE: J16.12 R64.2 U2.C6 U8.13
WL_REG_ON: J16.51 R66.2 U2.D4 U8.12
N05187: R22.1 U2.U17
N11228: R20.2 U3.L8(ZQ)
N13296: R21.2 U4.L8(ZQ)
N14267: C43.1 R26.2 R27.2
N20531: C13.2 U2.L3 Y1.2
N20543: C12.2 U2.L2 Y1.1
N21129: C14.2 U2.K1 X1.1
N21181: C16.2 U2.K2 X1.3(XOUT)
N46840: R28.1 U2.B2
N52730: C10.2 R13.2 R15.1 U1.2
N53240: C8.2 R11.2 R12.1 U1.5
N66029: C69.2 U2.B19
N66041: C70.2 U2.B18
N68845: D6.2 R44.2
N407654: C83.2 L4.1 RF1.1
N407798: C82.2 L4.2 U8.2
N407882: L5.1 U8.21
N407886: C86.2 L5.2 U8.23
N408186: C87.1 U8.10 X2.1
N408360: C88.1 U8.11(XTAL_OUT) X2.3(XOUT)
N409393: C77.1 Q1.3 R45.1
N409401: R45.2 U5.1
N421423: R56.1 U8.24
N424938: D10.2 U7.6
N424942: D10.1(CATHODE) R55.1
N425200: D8.1(CATHODE) R53.1
N425264: D9.1(CATHODE) R54.1
N445250: D1.1(CATHODE) R7.1
N463506: Q1.1 Q2.3 R46.2
N633981: C5.2 R5.2 R6.1 U1.14
N634415: C7.1 R4.2 R8.1 U1.9
N640022: R10.2 U1.22
N650031: R29.1 U2.D2
N724514: R9.2 U1.10
N4530222: R49.1 U6.3
N4695831: D5.1(CATHODE) R38.1
N4699401: D4.1(CATHODE) R37.1
N5299030: L3.1 U1.24
N5300360: L2.1 U1.7
N6341190: L1.1 U1.12

Pads without a net: J12 A8 B8; J13 A5 A8 B5 B8; RF1 2; U1 15 16 17 19; U2 B9 B17 C9 C17 D9 E9 E10 E18 E19 F10 N2; U3 J1 J9 L1 L9; U4 J1 J9 L1 L9; U7 4 5; U8 4 5 8 25 26 27 28 29 30 32 35 37 38 39 40

## Via types
v1: diameter 0.45, hole 0.2, TOP to BOTTOM, 819 vias

## Routing (per net, layer and track width the routed paths; a pad name or vN(x,y) marks a point on that pad's centre or on a via; arc(x,y) is an arc through that point)
GND: length 388.2
  TOP w0.127: 52.18,20.71 52.25,20.71 52.64,20.71
  TOP w0.178: U2.V12 v1(43.79,22.22) ; 40.87,21.24 40.54,20.92 40.22,21.24 ; U2.M5 v1(39.24,17.02) ; U2.B10 v1(32.74,20.27) ; U2.M10 39.89,20.27 U2.M9 ; U2.M10 38.92,21.24 U2.L11 ; U2.M10 39.89,20.92 ; U2.M10 v1(39.24,20.27) ; U2.M8 v1(39.89,19.62) U2.M9 ; U2.M8 v1(39.24,18.97) U2.L8 ; U2.M8 v1(39.89,18.97) ; U2.M8 v1(39.24,19.62) ; 38.59,18.97 38.26,19.29 U2.K8 ; 38.59,18.97 U2.K7 ; 38.59,18.97 38.91,19.29 U2.L8 ; U2.L11 v1(39.24,21.57) ; U2.L11 38.27,21.9 U2.K12 ; U2.L11 U2.K10 ; v1(39.24,21.57) U2.M11 ; v1(39.24,21.57) U2.L12 ; v1(39.24,21.57) U2.M12 ; U2.K13 v1(37.94,22.22) ; U2.K13 38.91,23.2 ; U2.K13 37.94,22.87 U2.K14 ; v1(37.94,22.22) U2.J12 ; v1(37.94,22.22) U2.K12 ; U2.L14 v1(39.24,23.52) ; U2.L14 v1(39.24,22.87) ; U2.L14 38.91,23.2 ; v1(39.24,23.52) U2.M14 ; v1(39.24,23.52) 38.92,23.85 38.59,23.52 ; U2.K7 v1(37.94,18.97) ; U2.K7 v1(37.94,18.32) ; v1(37.94,18.97) U2.J7 ; v1(37.94,18.97) U2.K8 ; v1(37.94,18.97) U2.J8 ; v1(39.89,21.57) U2.N11 ; v1(39.89,21.57) U2.M12 ; v1(39.89,21.57) U2.M11 ; v1(39.89,21.57) U2.N12 ; U2.N11 v1(40.54,21.57) ; U2.N11 40.22,21.24 ; U2.J6 37.62,17.99 v1(37.94,17.67) U2.K6 v1(37.94,18.32) ; U2.J6 v1(37.29,17.67) ; U2.J6 v1(37.29,18.32) U2.J7 ; U2.J6 v1(37.94,18.32) ; 39.89,20.92 39.57,21.24 39.57,21.24 ; 39.89,20.92 40.22,21.24 ; U2.J3 U2.H2 v1(37.29,15.07) ; U2.P12 v1(40.54,21.57) ; U2.P12 v1(41.19,21.57) U2.P11 v1(40.54,21.57) ; U2.P12 v1(41.19,22.22) U2.P13 ; U2.P12 v1(40.54,22.22) ; v1(40.54,21.57) U2.N12 ; U2.V15 v1(43.79,24.17) ; v1(39.89,22.22) U2.N12 ; v1(39.89,22.22) U2.M12 ; v1(39.89,22.22) U2.N13 ; v1(39.89,22.22) U2.M13 ; U2.N12 v1(40.54,22.22) ; U2.V9 v1(43.79,19.62) ; U2.J9 v1(37.29,19.62) U2.J8 ; U2.J9 v1(37.29,20.27) ; U2.J9 v1(37.94,19.62) ; U2.J9 v1(37.94,20.27) ; U2.J7 v1(37.94,18.32) ; U2.J7 v1(37.29,18.97) U2.J8 ; v1(32.04,20.28) 32.04,19.95 32.36,19.63 33.38,19.63 U2.C8 ; U2.J12 v1(37.29,22.22) U2.H12 ; U2.J12 v1(37.29,21.57) ; U2.J12 v1(37.94,21.57) ; U2.V6 v1(43.79,17.67) ; U2.K12 38.91,22.55 U2.L13 ; U2.K12 v1(37.94,21.57) ; U2.M13 v1(39.89,22.87) ; U2.M13 v1(39.24,22.22) ; U2.M13 v1(39.24,22.87) ; v1(39.89,22.87) U2.M14 ; v1(39.89,22.87) U2.N14 ; v1(39.89,22.87) U2.N13 ; U2.V3 v1(43.79,16.37) U2.V4 ; U2.G12 v1(36.64,21.57) ; U2.G12 v1(36.64,22.22) U2.H12 ; U2.G12 v1(35.99,22.22) U2.F12 ; U2.G12 v1(35.99,21.57) ; v1(36.64,21.57) U2.H12 ; v1(36.64,21.57) U2.G11 ; v1(36.64,21.57) U2.H11 ; U2.A19 v1(32.09,26.77) ; U2.H12 v1(37.29,21.57) ; v1(40.54,22.22) U2.P13 ; v1(40.54,22.22) U2.N13 ; U2.L18 v1(39.24,26.12) ; U2.A2 32.15,15.39 32.06,15.31 v1(31.94,15.31) ; U2.M12 v1(39.24,22.22) ; U2.M11 39.57,21.24 ; U2.L13 v1(39.24,22.22) ; U2.L13 38.27,23.2 U2.K14 ; U2.L13 v1(39.24,22.87) ; v1(39.24,22.22) U2.L12 ; U2.V2 v1(43.79,15.07) U2.W1 v1(44.44,14.42) U2.Y1 v1(45.09,14.42) ; U2.Y2 45.14,15.39 ; U2.A20 v1(32.09,27.42) ; 33,14.37 33,14.68 U2.B1 ; U2.M9 v1(39.24,20.27) ; U2.M9 v1(39.24,19.62) ; U2.R10 v1(41.84,20.92) ; U7.3 v1(3.54,26.08) ; U2.K8 v1(37.94,19.62) ; U2.K8 38.91,19.94 U2.L9 ; U2.L9 38.27,20.59 U2.K10 ; U2.L9 v1(39.24,20.27) ; U2.L9 v1(39.24,19.62) ; U2.K9 v1(37.94,19.62) ; U2.K9 v1(37.94,20.27) ; U2.K9 38.27,19.94 U2.L8 ; U2.K9 38.91,20.59 U2.L10 ; v1(37.94,19.62) U2.J8 ; U2.K14 v1(37.94,23.52) ; U2.K14 38.59,23.52 ; U2.K10 37.61,21.24 ; U2.K10 v1(37.94,20.27) ; U2.P7 v1(41.19,18.32) ; U2.F18 v1(35.99,25.47) ; U2.L12 38.91,21.9 U2.K11 ; U2.L12 38.27,22.55 ; v1(39.24,19.62) U2.L8 ; v1(37.29,20.27) U2.J10 ; v1(37.29,20.27) U2.H10 ; U2.K11 38.26,21.24 U2.J10 ; U2.K11 v1(37.94,21.57) ; U2.K11 U2.L10 ; v1(39.24,20.27) U2.L10 ; v1(39.24,22.87) U2.M14 ; U2.J10 36.96,21.24 U2.H11 ; U2.J10 v1(37.94,20.27) ; U2.E5 v1(34.69,17.02) ; U2.H10 37.61,21.24 ; U2.H10 36.31,21.24 ; 37.61,21.24 U2.J11 ; U2.T5 v1(42.49,17.02) ; v1(39.89,23.52) U2.N14 ; v1(39.89,23.52) U2.N15 40.54,23.52 U2.N14 ; v1(39.89,23.52) U2.M14 ; U2.N14 40.54,22.87 ; U2.N18 v1(39.89,25.47) ; 38.91,23.2 38.59,23.52 ; 35.66,21.25 v1(35.99,21.57) ; 35.66,21.25 35.99,20.92 ; 35.66,21.25 35.34,21.57 U2.F12 ; v1(35.99,21.57) U2.G11 ; v1(35.99,21.57) U2.F12 ; U2.T7 v1(42.49,18.97) ; U2.Y20 44.86,27.19 44.86,27.47 ; U2.V17 v1(43.79,25.47) U2.W17 v1(44.44,25.47) ; U2.F9 v1(35.34,20.27) ; U2.H18 v1(37.29,26.12) ; 35.99,20.92 36.31,21.24 ; 35.99,20.92 U2.G10 36.31,20.6 U2.H11 ; 39.57,21.24 U2.L10 ; v1(37.29,21.57) U2.H11 ; v1(37.29,21.57) U2.J11 ; U2.M3 v1(39.24,16.37) ; 36.31,21.24 U2.G11 ; 40.54,22.87 U2.N13 ; 40.54,22.87 U2.P13 ; U2.F12 v1(35.34,22.22) ; U2.H1 v1(37.29,14.42) ; v1(37.94,21.57) U2.J11 ; U2.K3 v1(38.59,16.37) ; U2.D18 v1(34.04,26.12) ; 44.11,27.47 U2.W20 ; U2.R18 v1(41.84,26.12) ; 32.04,23.62 32.19,23.62 U2.A15 ; U2.C10 v1(33.39,20.27) ; U2.F3 v1(35.34,15.72) ; U2.Y19 v1(45.09,26.77) ; U2.C4 v1(33.39,16.37) ; U2.A1 v1(32.09,14.42) ; U2.B20 v1(32.74,27.42) ; U2.T13 v1(41.84,22.22)
  TOP w0.254: 5.9,35 J9.1 3,32.1 ; 52.64,20.71 52.8,20.71 U4.J8 ; C58.2 62.59,16.6 v1(63.1,17.11) 62.59,17.62 C38.2 ; v1(11.82,27.85) 11.78,27.85 11.5,27.57 C9.2 ; v1(62.97,27.52) C52.2 v1(62.97,26) ; U4.T1 v1(59.21,26.3) ; 11.19,11.43 v1(10.18,11.43) 9.18,11.43 ; C86.1 23.86,3.17 ; C86.1 23.35,2.62 ; C86.1 v1(22.41,3.17) ; 16.19,30.87 J13.A1B12 ; J13.A1B12 16.19,32.09 v1(16.71,32.62) ; J13.A1B12 16.74,31.72 ; v1(13.73,21.88) 13.62,21.77 U1.13 ; C2.2 15.22,28.3 ; C2.2 14.71,27.75 ; C2.2 15.73,27.75 ; C42.2 v1(49.28,22.49) R21.1 ; U4.P1 v1(59.21,24.7) ; 6.59,6.98 C88.2 ; C88.2 v1(7.09,6.34) ; C88.2 7.6,6.98 ; C56.2 v1(63.05,14.57) ; U4.D8 v1(52.81,16.7) U4.E8 ; C81.1 v1(3.51,31.79) ; v1(44,5.22) 44.3,5.52 J11.10 ; 15.96,18.89 R6.2 ; R6.2 v1(16.75,19.4) ; R6.2 15.96,19.9 ; C54.2 v1(63.1,25.24) ; C54.2 62.44,25.75 ; C54.2 62.44,24.73 ; C65.2 43.31,1.23 v1(42.88,1.23) ; C65.2 43.7,1.11 ; C65.2 43.15,1.62 ; J11.9 v1(34.14,5.04) ; v1(63.1,19.4) 62.85,19.65 R23.2 ; SW2.2 v1(62.1,9.25) ; SW2.2 v1(62.85,8.22) ; SW2.2 61.25,8.22 ; SW2.2 62.1,7.12 ; v1(21.19,36.92) 21.44,36.67 J12.16 ; C87.2 v1(7.09,10.53) ; C87.2 6.59,9.97 ; C87.2 7.6,9.97 ; 9.02,36.67 v1(7.87,36.67) 6.71,36.67 ; v1(62.97,11.78) C53.2 v1(62.97,13.3) ; C15.2 v1(55.38,8.42) ; v1(31.98,33.06) 31.98,33.06 J12.13 30.92,32.49 J12.A1B12 ; U8.36 18.68,13.39 v1(18.98,13.1) ; 9.69,31.94 9.13,32.5 v1(9.13,33.11) ; C84.1 v1(17.28,0.91) ; 16.85,36.67 v1(18.01,36.67) 19.16,36.67 ; v1(44.11,28.11) 44.11,27.47 ; v1(22.4,31.07) 22.44,31.11 23.17,31.11 23.66,31.59 ; U5.2 49.28,5.65 49.08,5.45 49.08,5.25 v1(49.03,5.2) ; 12.96,26.25 v1(12.96,26.76) 12.41,26.76 ; v1(28.4,8.55) 28.38,8.52 28.38,8.42 27.92,7.97 R37.2 ; U1.21 16.13,22.75 v1(16.02,22.65) ; R38.2 29.7,7.23 31.02,8.55 v1(31.35,8.55) ; v1(10.18,13.23) 11.19,13.23 ; v1(10.18,13.23) 10.18,13.78 ; v1(10.18,13.23) 9.18,13.23 ; U1.18 16.52,20.9 ; U1.18 16.12,21.79 v1(16.02,21.88) ; U1.18 16.12,20.15 ; 5.9,3 J7.1 3,5.9 ; 9.69,30.87 J13.B1A12 9.13,31.72 ; U4.A9 v1(52.01,13.5) ; 58.1,3 J5.1 61,5.9 ; v1(59.6,18.74) 59.57,18.74 59.54,18.7 U4.G1 ; C6.2 v1(11.23,18.68) ; v1(37.32,13.3) 38.34,12.28 C14.1 ; 7.87,31.51 J13.14 ; J13.14 v1(7.87,32.85) ; J13.14 9.02,32.49 ; J13.14 6.71,32.49 ; 45.14,15.39 v1(45.42,15.39) ; v1(59.39,13.76) 59.39,14.01 58.81,14.6 U4.B1 ; J12.14 22.99,32.49 ; J12.14 22.6,31.72 J12.B1A12 ; J12.14 21.84,31.51 ; J12.14 v1(21.15,32.49) ; 31,13.02 R31.2 32.17,13.02 33,13.85 v1(33,14.16) 33,14.37 ; J11.6 41,2.8 39.71,1.51 v1(39.67,1.51) ; v1(31.63,23.62) 32.04,23.62 ; 61,32.1 J6.1 58.1,35 ; J12.A1B12 30.16,30.87 ; J12.A1B12 30.71,31.72 ; v1(4.81,11.55) 5.32,11.55 ; v1(4.81,11.55) 4.81,11 ; v1(4.81,11.55) 4.3,11.55 ; v1(40.55,10.48) 40.57,10.46 40.57,9.62 39.79,8.84 X1.2 39.82,8.72 39.82,8.27 39.56,8.02 37.42,8.02 37.17,8.27 v1(37.17,10.51) 37.24,10.51 37.45,10.3 37.53,10.3 37.69,10.14 X1.4 ; C57.2 v1(63.1,22.7) ; v1(23.05,32.91) 23.05,32.58 23.66,31.97 ; R7.2 v1(54.85,36.29) ; v1(59.65,16.7) 59.42,16.7 59.02,17.1 U4.E1 58.73,17.03 58.09,17.03 U4.E2 ; U4.B3 v1(57.6,15.09) ; v1(51.8,18.51) 52,18.51 52.2,18.7 U4.G9 ; R15.2 v1(18.04,26.81) ; R56.2 v1(23.35,9.19) ; v1(5.71,10.41) X2.4 v1(6.32,9.58) ; 62.44,23.46 C55.2 ; C55.2 v1(63.1,23.97) ; C55.2 62.44,24.48 ; v1(63.1,18.38) 62.85,18.63 C41.2 ; v1(3.55,7.88) X2.2 v1(4.41,7.17) ; v1(59.52,15.91) 59.21,15.91 U4.D1 ; U4.M9 52.39,22.69 v1(51.69,22.69) ; v1(13.73,24.17) 13.62,24.28 U1.6 13.62,25.94 13.62,25.95 ; U4.M1 v1(59.21,23.1) ; C59.2 62.85,15.59 v1(63.1,15.84) ; C1.2 v1(10.14,23.97) ; v1(51.1,32.71) SW1.2 v1(53.62,32.71) ; C11.2 v1(18.5,26.05) ; U4.G8 v1(53.62,18.29) ; 8.36,11 v1(8.36,11.55) ; v1(8.36,11.55) 7.86,11.55 ; v1(8.36,11.55) 8.87,11.55 ; U1.4 14.62,24.29 v1(14.49,24.17) ; C70.1 v1(29.5,25.49) ; U4.B9 v1(51.75,14.7) ; U4.F9 52.3,17.9 52.2,17.8 51.93,17.8 v1(51.51,17.38) ; 19.92,21.73 v1(20.61,21.73) ; 44.86,27.47 44.86,27.54 v1(44.89,27.57) ; 16.11,25.87 16.12,25.87 U1.1 16.12,24.27 v1(16.02,24.17) ; U4.P9 v1(52.01,24.7) ; U4.T9 v1(52.01,26.3) ; U4.J2 v1(58.39,19.92) ; J13.13 v1(17.72,32.49) ; v1(51.7,20.77) 51.75,20.71 52.18,20.71 ; 43.15,6.13 J11.10 ; J11.10 45.46,6.13 ; C7.2 v1(7.04,22.95) ; R39.2 v1(35.03,10.1)
  GND w0.254: 3,5.82 J7.1 5.82,3 ; 61,5.82 J5.1 58.18,3 ; 3,32.18 J9.1 5.82,35 ; 58.18,35 J6.1 61,32.18
  BOTTOM w0.127: 52.68,19.93 52.64,19.89 52.18,19.89 52.14,19.93
  BOTTOM w0.178: R51.2 10.43,24.79 9.01,24.79 8.97,24.76 ; v1(32.09,27.42) 32.12,27.42 32.74,26.8 ; C63.2 41.64,25.92 v1(41.84,26.12) ; C68.1 32.77,26.77 ; 32.77,26.77 v1(32.09,26.77) ; 32.77,26.77 32.74,26.8 ; 44.79,27.47 44.57,27.24 C40.2 ; 39.86,14.37 C66.2 ; 37.83,14.37 37.83,14.54 37.57,14.8 C26.2 ; v1(35.99,25.47) 36,25.48 C32.2 ; R22.2 43.39,27.47 ; 32.77,27.47 32.77,27.45 v1(32.74,27.42) 32.74,26.8 ; U4.J8 53.05,20.3 52.68,19.93 ; C28.2 38.73,16.88 v1(39.24,16.37)
  BOTTOM w0.254: 58.1,35 J6.1 61,32.1 ; R47.2 59.42,10.02 ; R47.2 58.4,10.02 ; R47.2 v1(58.91,9.49) ; R32.2 36.81,12.77 ; R32.2 36.3,13.31 ; R32.2 35.8,12.77 ; U6.2 8.62,24.4 8.97,24.76 ; v1(59.39,13.76) 59.25,13.9 U3.A9 ; 5.9,35 J9.1 3,32.1 ; 53.6,1.57 v1(53.6,3.07) ; v1(53.6,3.07) 53.6,4.57 ; v1(53.6,3.07) 54.08,3.07 ; v1(51.69,22.69) 51.71,22.7 U4.M9 ; U4.G9 52.21,18.51 v1(51.8,18.51) ; C47.2 v1(63.1,17.11) ; C47.2 C38.2 ; C47.2 C58.2 ; J16.33 35.2,4.5 v1(35.64,4.94) ; J16.46 v1(40,5.87) ; U4.B9 v1(51.75,14.7) ; 58.77,17.87 v1(59.8,17.87) ; 58.77,17.87 U3.F9 ; 58.77,17.87 58.64,17.74 U4.E2 ; U3.D8 v1(57.62,15.91) ; C49.2 v1(63.1,19.4) ; U4.P9 v1(52.01,24.7) ; v1(44.11,28.11) 44.03,28.11 43.39,27.47 ; Q2.2 62.75,11.5 ; Q2.2 62.14,12.14 ; Q2.2 v1(62.14,10.84) ; C85.1 8.39,6.44 ; C85.1 8.39,5.43 ; C85.1 v1(8.14,5.93) ; C77.2 v1(57.69,9.72) ; 62.97,23.81 v1(62.97,24.48) 62.97,25.14 ; J16.28 v1(32.82,6.93) ; U3.G8 58.08,18.63 58.74,18.63 U4.G1 59.54,18.7 59.57,18.74 v1(59.6,18.74) ; J15.57 44.8,32.11 44.46,32.45 44.46,32.51 44.44,32.53 v1(44.44,32.57) ; 62.97,14.98 C44.2 62.97,13.65 ; C48.2 v1(63.1,15.84) ; C48.2 62.44,16.35 ; C48.2 62.44,15.33 ; U3.D1 v1(52.81,16.7) U4.E8 ; U4.B1 58.89,14.63 59.49,14.63 v1(59.57,14.54) ; 61.96,7.69 C76.2 ; C76.2 62.47,8.23 ; C76.2 v1(62.92,7.69) ; J16.80 53.6,6.27 v1(53.73,6.14) ; 58.1,3 J5.1 61,5.9 ; C50.2 v1(63.1,18.38) ; 52.14,19.93 51.95,20.12 51.95,20.51 v1(51.7,20.77) ; J16.36 v1(36,5.86) ; J16.2 22.4,7.98 22.11,8.27 21.09,8.27 v1(20.56,8.8) ; 32.77,27.47 C71.2 ; C74.2 v1(30.49,28.87) ; C74.2 29.94,28.29 ; C74.2 30.49,27.78 ; 39.86,14.37 40.6,13.63 C13.1 41.17,12.72 v1(41.17,11.79) 41.17,10.88 40.78,10.48 v1(40.55,10.48) 40.52,10.51 v1(37.17,10.51) 37.11,10.56 37.11,13.09 v1(37.32,13.3) 37.57,13.3 v1(37.83,13.55) 37.83,14.37 ; U3.E1 52.26,17.25 51.63,17.25 v1(51.51,17.38) 51.34,17.21 49.79,17.21 49.28,17.72 C39.2 ; U3.B3 v1(53.61,14.3) ; U4.M1 v1(59.21,23.1) ; J16.19 v1(29.6,2.15) ; C51.2 v1(63.13,20.41) ; v1(9.91,22.95) 10.19,23.23 R49.2 R50.1 10.83,22.09 v1(9.92,22.09) ; R20.1 v1(63.1,21.43) ; 44.79,27.47 v1(44.89,27.57) ; v1(47,32.45) 47.2,32.25 J15.63 ; R55.2 v1(3.77,22.55) ; J15.29 v1(33.6,31.4) ; U4.T1 v1(59.21,26.3) ; J15.69 v1(49.6,31.91) ; C57.2 v1(63.1,22.7) ; C60.2 33.18,14.34 v1(33,14.16) ; J16.18 v1(28.77,6.93) ; C18.2 v1(29.98,21.15) ; U4.J2 v1(58.39,19.92) ; U4.T9 v1(52.01,26.3) ; J15.19 v1(29.6,30.77) ; U4.P1 v1(59.21,24.7)
  BOTTOM w0.508: U6.2 8.62,22.88 8.44,22.7 6.88,22.7
  vias: v1(0.94,26.93) v1(0.94,25.66) v1(0.94,24.04) v1(0.94,22.77) v1(0.94,21.29) v1(0.94,20.02) v1(0.99,32.44) v1(0.99,31.17) v1(0.96,29.75) v1(0.96,28.48) v1(1.1,7.81) v1(1.1,6.54) v1(2.37,7.81) v1(2.37,6.54) v1(3.59,6.05) v1(4.24,16.42) v1(4.24,15.15) v1(4.22,14.34) v1(4.27,10.89) v1(4.48,13.53) v1(4.86,6.05) v1(4.96,14.32) v1(5.11,16.68) v1(5.19,15.64) v1(5.19,13.53) v1(5.39,11.47) v1(5.52,23.16) v1(5.52,22.11) v1(5.7,15.1) v1(5.7,11.06) v1(5.77,14.32) v1(6,13.53) v1(6.36,11.5) v1(6.44,0.86) v1(6.56,14.32) v1(6.74,13.55) v1(6.87,11.06) v1(7.42,13.53) v1(7.42,11.55) v1(7.47,14.34) v1(7.71,0.86) v1(7.91,10.35) v1(8.19,14.27) v1(8.21,13.53) v1(8.64,10.71) v1(8.69,4.53) v1(8.69,3.26) v1(8.77,30.67) v1(8.82,16.05) v1(8.82,14.78) v1(8.92,13.53) v1(8.97,14.09) v1(8.98,0.86) v1(9.2,33.72) v1(9.4,36.44) v1(9.38,30.67) v1(9.79,33.92) v1(10.09,16.05) v1(10.09,14.78) v1(10.25,0.86) v1(10.67,36.44) v1(11.48,17.05) v1(11.48,15.78) v1(11.52,0.86) v1(11.94,36.44) v1(12.01,10) v1(12.31,28.16) v1(12.54,10.86) v1(12.79,0.86) v1(13.21,36.44) v1(13.28,10) v1(13.52,11.22) v1(13.73,23.41) v1(13.73,22.65) v1(14.06,0.86) v1(14.48,36.44) v1(14.49,23.41) v1(14.49,22.65) v1(14.49,21.88) v1(15.22,27.77) v1(15.26,24.17) v1(15.26,23.41) v1(15.26,22.65) v1(15.26,21.88) v1(15.33,0.86) v1(15.75,36.44) v1(16.02,23.41) v1(17.33,15.71) v1(17.53,31.05) v1(17.53,30.52) v1(17.53,30.01) v1(17.89,16.35) v1(18.5,7.1) v1(18.68,2.93) v1(18.9,5.98) v1(18.9,4.71) v1(20.96,18.51) v1(21.24,17.97) v1(21.39,22.54) v1(21.39,21.27) v1(21.79,13.23) v1(21.79,11.43) v1(22.71,19.37) v1(22.79,20.11) v1(23.4,11.85) v1(24.21,24.02) v1(24.75,27.02) v1(26.77,5.25) v1(27.34,19.7) v1(29.32,21.15) v1(29.7,1.46) v1(29.98,21.94) v1(30.23,27.52) v1(30.23,26.51) v1(30.72,1.49) v1(31.66,1.49) v1(31.99,36.71) v1(32,34.93) v1(32.65,33.14) v1(32.58,32.65) v1(34.4,34.93) v1(36.8,34.93) v1(39.2,34.93) v1(39.35,12.18) v1(45.6,35.29) v1(46.22,0.82) v1(46.4,6.93) v1(47.49,0.82) v1(48.76,0.82) v1(50.03,0.82) v1(50.27,20.77) v1(51.3,0.82) v1(52,31.38) v1(52.57,0.82) v1(53.84,0.82) v1(54.91,2.21) v1(54.91,0.94) v1(56.18,3.53) v1(56.18,2.21) v1(56.18,0.94) v1(57.44,34.06) v1(57.44,32.79) v1(57.5,5.46) v1(57.45,3.53) v1(57.45,2.21) v1(57.45,0.94) v1(57.92,32.95) v1(58.77,5.46) v1(59.69,31.52) v1(60.47,10.33) v1(61.36,31.03) v1(61.36,29.76) v1(61.36,28.49) v1(61.74,10.33) v1(62.47,9.79) v1(62.63,31.03) v1(62.63,29.76) v1(62.63,28.49) v1(63.01,10.33) v1(63.13,23.36)
V3: length 1.4
  TOP w0.254: C81.2 2.55,29.98 U7.10
VBUS_5VIN: length 20.2
  TOP w0.178: 4.38,30.88 4.04,30.54 U7.7
  TOP w0.254: 4.38,30.88 4.48,30.98 v1(4.48,31.49) ; v1(11.13,32.81) 10.49,32.16 J13.B4A9
  TOP w0.508: J13.B4A9 10.49,30.51 10.93,30.06 14.88,30.06 15.39,30.57 J13.A4B9
  BOTTOM w0.254: v1(4.48,31.49) 4.48,31.64 5.16,32.32 10.65,32.32 v1(11.13,32.81) ; v1(10.89,30.16) 10.89,30.02 10.9,30.01 R14.1 11.18,29.02 C80.2
  vias: v1(10.55,29.66) v1(11.26,29.58)
VCC_0V9_2A: length 5
  TOP w0.254: 9.1,28.39 9.18,28.46 11.39,28.46 11.72,28.79 C8.1 R11.1
VCC_1V8: length 18
  TOP w0.178: U2.P14 v1(41.19,23.52) ; U2.R16 v1(41.19,24.17) ; v1(37.94,17.02) 37.62,17.34 U2.J5 v1(37.29,17.02) U2.J4 ; v1(37.94,17.02) U2.J4 ; v1(37.94,17.02) U2.K4 ; v1(37.94,17.02) U2.K5 ; U2.J4 v1(37.29,16.37) ; U2.M17 v1(39.89,24.82) ; U2.L7 v1(38.59,18.32)
  TOP w0.254: v1(29.73,11.82) 29.73,12.08 J8.1
  POWER w0.178: 36.74,14.37 36.74,15.03 36.99,15.29 36.99,16.04
  POWER w0.254: 36.74,14.37 36.74,14.11 36.38,13.76 32.53,13.76 32.28,14.01 31.93,14.01 v1(29.73,11.82)
  BOTTOM w0.178: v1(38.59,18.32) C28.1 ; v1(41.19,24.17) 41.19,23.9 C64.1 41.1,23.61 v1(41.19,23.52) 41.19,22.89 C33.1
VCC_1V35_2A: length 2.8
  TOP w0.254: R13.1 C10.1 18.73,28.84 R2.1
VCC_3V3: length 45.3
  TOP w0.178: U2.T16 v1(41.84,24.82) ; U2.G4 v1(35.99,16.37) U2.F4 v1(35.34,16.37) U2.E4 v1(34.69,16.37) ; U2.M4 v1(39.89,16.37) ; U2.G17 v1(35.99,24.82) ; U2.D12 v1(34.04,22.22) ; U2.C20 v1(33.39,27.42) 33.34,27.47
  TOP w0.254: D8.2 D9.2 4.41,19.89 3.89,19.37 v1(3.89,18.89) ; 33.34,27.47 32.95,27.86 31.54,27.86 C67.2 ; D2.2 23.48,10.83 23.38,10.94 v1(23.38,11) ; U5.7 51.78,6.61 51.96,6.43 52.78,6.43 53.53,7.18 v1(53.53,8.58) ; R16.1 v1(41.64,10.02) ; J11.4 v1(38.8,4.7) ; v1(45.35,1.44) 45.17,1.62 C65.1 ; D1.2 v1(57.18,36.19) ; C84.2 v1(18.24,0.9) ; R17.1 v1(49.41,36.9) ; R18.1 v1(56.37,6.21)
  BOTTOM w0.178: C62.1 34.69,15.4 34.69,16.23 ; 34.69,16.23 C60.1 ; 34.69,16.23 v1(34.69,16.37) v1(35.34,16.37) v1(35.99,16.37) 35.99,15.37 C61.1 ; C66.1 39.86,16.34 v1(39.89,16.37) ; 34.25,15.15 34.25,14.37
  BOTTOM w0.254: R59.1 v1(17.51,6.06) ; J16.20 29.6,5.51 29.85,5.26 v1(30.4,5.26) ; R62.1 v1(13.37,7.71) ; v1(10.18,6.03) 9.45,6.03 C85.2 ; v1(59.06,6.52) Q1.2 60.99,6.52 R46.1 C76.1 ; R52.1 v1(24.77,28.03) ; v1(11.28,6.06) 11.26,6.06 11.16,5.96 R66.1 ; R60.1 v1(16.49,6.06) ; v1(30.63,4.73) 30.63,4.73 30.63,5.03 v1(30.4,5.26) ; R64.1 v1(12.17,6.06) ; R58.1 v1(13.19,6.06) ; v1(30.4,5.26) J16.22 ; R44.1 v1(24.52,22.95) ; R63.1 v1(13.37,8.73) ; R61.1 v1(15.22,6.06) ; R30.2 34.25,13.76 34.25,14.37 ; R57.1 v1(14.21,6.06) ; R65.1 v1(20.3,9.57)
  vias: v1(6.53,17.39) v1(6.53,16.63) v1(6.53,15.84) v1(7.29,17.39) v1(7.29,16.63) v1(7.29,15.84) v1(20.48,2.93) v1(23.4,10.25)
VCC_3V3_2A: length 13.8
  TOP w0.254: C6.1 8.97,18.63 8.97,18.03 9.15,17.85 12.35,17.85 12.89,18.38 C5.1 R5.1 ; J1.1 4.81,18.43 6.08,19.7 6.79,20.41 R3.1 6.43,20.82 6.43,23.56 6.84,23.97 R4.1
VCC_CPU: length 15.2
  TOP w0.178: U2.G9 v1(36.64,19.62) ; U2.G9 v1(35.99,19.62) U2.G8 ; U2.G9 v1(35.99,20.27) ; U2.G9 v1(36.64,20.27) U2.H9 v1(36.64,19.62) ; v1(36.64,19.62) U2.H8 v1(36.64,18.97) ; v1(36.64,19.62) U2.G8 ; U2.H14 v1(36.64,22.87) ; U2.H14 v1(37.29,22.87) ; U2.H14 v1(37.29,23.52) U2.J14 v1(37.29,22.87) ; U2.H14 v1(36.64,23.52) U2.G14 ; v1(36.64,22.87) U2.G13 v1(35.99,22.87) U2.G14 ; v1(36.64,22.87) U2.G14 ; v1(36.64,22.87) U2.H13 v1(37.29,22.87) ; U2.G8 v1(35.99,18.97) U2.G7 ; U2.G8 v1(36.64,18.97) ; v1(37.29,22.87) U2.J13 ; U2.G14 v1(35.99,23.52) ; v1(36.64,18.97) U2.G7 ; v1(36.64,18.97) U2.H7 v1(36.64,18.32) U2.G7 ; U2.G7 v1(35.99,18.32)
  BOTTOM w0.254: C24.1 v1(30.94,21.99)
  vias: v1(6.37,30.19) v1(6.37,29.4) v1(6.37,28.64) v1(7.13,30.19) v1(7.13,29.4) v1(7.13,28.64) v1(30.87,21.12)
VCC_DDR: length 256.3
  TOP w0.178: v1(40.54,20.27) U2.P10 v1(41.19,20.27) U2.P9 ; v1(40.54,20.27) U2.P9 ; v1(40.54,20.27) U2.N10 ; v1(40.54,20.27) U2.N9 v1(40.54,19.62) ; U2.P9 v1(41.19,19.62) U2.P8 ; U2.P9 v1(40.54,19.62) ; v1(40.54,19.62) U2.P8 ; v1(40.54,19.62) U2.N8 v1(40.54,18.97) U2.P8 ; U2.P8 v1(41.19,18.97)
  TOP w0.254: U4.D2 58.01,16.3 v1(58.4,15.92) ; U4.N1 v1(59.21,23.9) ; U4.N9 51.41,24.5 v1(51.41,24.75) ; U4.E9 v1(52.01,16.7) ; C54.1 v1(60.81,25.24) ; R19.1 C34.1 62.49,21.68 62.9,22.09 v1(63.08,22.09) ; U4.K2 v1(58.4,20.71) ; v1(51.82,19.45) 51.83,19.45 51.88,19.5 U4.H9 ; U4.D9 52.33,16.22 51.7,16.22 v1(51.37,16.55) ; U4.R9 51.88,25.63 v1(51.88,25.74) ; U4.H2 v1(57.61,19.9) ; U4.F1 59.06,17.9 59.54,17.41 60.13,17.41 v1(60.14,17.4) ; C57.1 v1(60.81,22.7) ; U4.A8 v1(52.81,13.5) ; v1(54.64,17.74) 54.64,18.07 U4.G7 ; v1(51.67,15.5) U4.C9 ; v1(61.45,11.78) C53.1 v1(61.45,13.3) ; U4.K8 v1(53.6,20.71) ; C55.1 v1(60.81,23.97) ; v1(58.86,13.33) 58.86,13.85 U4.A1 ; v1(61.45,27.52) C52.1 v1(61.45,26) ; v1(59.57,15.36) 58.95,15.36 U4.C1 ; U4.B2 v1(57.6,14.3) ; U4.R1 v1(59.21,25.5)
  POWER w0.102: 50.91,25.75 50.91,25.8 51.75,26.63 52.28,26.63 53.75,25.16 54.87,25.16 55.05,24.98 55.25,24.98 ; 50.91,25.75 51.88,25.75 v1(51.88,25.74) ; 50.91,25.75 50.87,25.75 50.61,25.49 49.01,25.49 49,25.5 48.7,25.5 48.44,25.24 47.91,25.24 47.91,24.93 47.71,24.73 ; 56.8,22.77 56.8,23.46 56.6,23.66 ; 56.8,22.77 56.7,22.88 56.12,22.88 ; 56.8,22.77 56.88,22.7 56.88,21.99 56.85,21.96 ; 56.67,25.81 56.23,25.36 55.71,25.36 55.56,25.21 ; 56.67,25.81 56.67,24.55 ; 56.67,25.81 56.7,25.84 56.7,26.33 56.69,26.34 ; 52.13,24.35 52.48,24.7 52.51,24.7 52.71,24.5 52.74,24.5 52.76,24.48 ; 52.76,24.48 52.79,24.45 ; 52.76,24.48 53.43,24.48 53.64,24.27 ; 55.25,24.98 55.27,25 ; 55.25,24.98 55.11,24.84 53.88,24.84 53.66,25.06 52.99,25.06 52.51,25.54 50.66,25.54 ; 55.27,25 55.28,25 ; 55.27,25 55.3,25.03 55.35,25.03 55.38,25.06 55.4,25.06 55.56,25.21 ; 47.33,24.35 47.33,25.29 46.84,25.77 46.84,26.28 ; 47.33,24.35 47.33,23.97 47.35,23.94 ; 47.33,24.35 47.71,24.73 ; 46.84,26.28 46.54,26.58 46.54,27.22 ; 46.84,26.28 47.07,26.51 ; 47.71,24.73 48.24,24.73 ; 56.83,28.97 56.83,28.21 56.8,28.18 ; 56.83,28.97 56.45,28.59 55.56,28.59 55.18,28.21 54.41,28.21 53.59,29.04 50.63,29.04 50.18,28.58 48.83,28.58 48.45,28.2 48.27,28.2 48.17,28.1 ; 56.83,28.97 56.83,29.28 56.65,29.45 ; 51.38,23.21 51.95,23.21 52.53,22.62 52.53,22.6 52.67,22.46 54.39,22.46 54.39,22.47 54.54,22.62 55.1,22.62 55.3,22.42 55.73,22.42 55.73,22.44 55.92,22.63 55.92,22.68 55.99,22.75 ; 51.38,23.21 51.1,22.93 49.72,22.93 49.61,23.03 49.1,23.03 ; 51.38,23.21 49.3,23.21 49.15,23.06 49.13,23.06 49.08,23.01 49.06,23.01 49.03,22.98 48.15,22.98 48.1,23.03 47.86,23.03 47.84,23 47.56,23 47.35,23.21 ; 55.4,22.42 55.13,22.7 52.46,22.7 ; 56.6,23.66 55.94,23.66 55.81,23.54 55.51,23.54 55.26,23.29 55.23,23.29 ; 56.6,23.66 56.67,23.74 56.67,24.55 ; 55.34,24.22 55.29,24.27 53.64,24.27 53.64,24.27 ; 55.34,24.22 55.42,24.14 55.73,24.14 55.73,24.15 ; 55.34,24.22 54.9,24.22 54.74,24.07 53.68,24.07 53.47,24.27 ; 56.85,21.3 56.85,20.72 56.6,20.46 56.57,20.49 55.9,20.49 55.7,20.69 53.62,20.69 v1(53.6,20.71) 53.42,20.89 52.08,20.89 ; 56.85,21.3 56.12,21.3 56.03,21.22 55.9,21.22 55.77,21.09 54.11,21.09 54.09,21.1 54.08,21.1 53.89,21.29 49.84,21.29 49.78,21.35 48.8,21.35 48.45,20.99 48.45,20.76 48.15,20.46 47.61,20.46 47.58,20.49 47.02,20.49 46.87,20.64 ; 56.85,21.3 56.85,21.96 ; 54.21,27.47 53.27,28.41 50.91,28.41 50.14,27.64 48.86,27.64 48.7,27.48 48.4,27.48 48.39,27.49 48.36,27.49 48.2,27.64 48.2,27.73 48.17,27.76 48.17,28.1 ; 53.47,24.27 53.45,24.27 53.38,24.35 50.02,24.35 49.81,24.56 ; 53.47,24.27 53.64,24.27 ; 48.17,28.1 47.62,28.1 46.84,27.32 46.64,27.32 46.54,27.22 ; 56.8,27.19 56.54,26.93 55.4,26.93 55.07,26.6 54.23,26.6 52.99,27.84 51.22,27.84 51.21,27.83 51.19,27.83 50.41,27.05 49.97,27.05 49.95,27.04 49.94,27.04 49.59,26.69 49.27,26.69 49.22,26.74 49.21,26.74 48.93,27.02 47.53,27.02 47.53,26.97 47.07,26.51 ; 56.8,27.19 56.8,26.61 56.88,26.53 56.5,26.15 55.98,26.15 55.68,25.85 55.51,25.85 55.42,25.94 55.38,25.94 55.32,26 53.88,26 52.96,26.91 52.84,26.91 52.52,27.23 51.51,27.23 50.51,26.23 50.48,26.23 50.31,26.06 50,26.06 49.96,26.1 48.39,26.1 47.99,26.51 47.07,26.51 ; 56.8,27.19 56.8,28.18 ; 46.87,20.64 46.87,21.68 47.18,21.99 47.38,21.99 ; 46.87,20.64 46.87,19.65 47.15,19.37 48.12,19.37 48.39,19.64 48.39,19.7 48.9,20.21 49.79,20.21 49.82,20.24 52.99,20.24 ; 52.99,20.24 53.24,20.24 53.37,20.11 54.85,20.11 54.97,19.98 54.97,19.98 55.1,19.85 ; 52.99,20.24 53.38,19.85 55.22,19.85 55.35,19.98 55.36,19.98 55.53,20.16 56.32,20.16 56.57,20.41 ; 47.35,23.21 47.35,22.01 47.38,21.99 ; 47.35,23.21 47.35,23.94 ; 47.38,21.99 47.45,21.99 ; 55.21,29.92 54.86,29.92 54.52,30.27 50.17,30.27 49.72,29.81 48.1,29.81 48.05,29.76 47.8,29.76 47.51,29.46 47.51,29.15 47.42,29.06 47,29.06 46.94,29.13 46.43,29.13 46.42,29.13 46.35,29.13 46.25,29.23 45.96,29.23 45.88,29.15 ; 55.21,29.92 55.34,29.92 55.38,29.96 55.68,29.96 55.94,30.22 ; 55.21,29.92 55.51,30.22 56.55,30.22 56.7,30.06 ; 54.92,23.29 54.75,23.46 53.42,23.46 53.11,23.78 52.19,23.78 ; 56.7,30.06 56.7,30.83 56.45,31.08 55.41,31.08 55.21,30.88 49.88,30.88 49.42,30.42 47.24,30.42 46.68,29.86 46.03,29.86 45.88,29.71 45.88,29.15 ; 56.7,30.06 56.7,29.51 56.65,29.45 ; 49.59,24.73 49,24.73 ; 49.59,24.73 49.41,24.91 49.18,24.91 49,24.73 ; 49.59,24.73 49.6,24.73 49.77,24.56 49.81,24.56 ; 49,24.73 48.24,24.73 ; 56.65,29.45 56.19,29.45 55.78,29.04 55.46,29.04 55.45,29.05 55.4,29.05 55.18,29.28 54.54,29.28 54.19,29.63 50.42,29.63 49.96,29.17 48.57,29.17 48.17,28.77 47.9,28.77 47.81,28.68 47.35,28.68 47.26,28.59 46.65,28.59 45.99,27.93 45.98,27.93 45.98,27.47 46.26,27.19 46.51,27.19 46.54,27.22 ; 45.88,29.15 45.8,29.07 45.8,28.55 46.01,28.35 46.01,28.34 46.2,28.14 ; 55.99,22.75 56.12,22.88 ; 55.99,22.75 55.99,22.72 55.91,22.64 ; 56.12,22.88 56.12,22.87 ; 54.64,21.66 54.36,21.66 54.16,21.86 ; 54.64,21.66 55,21.66 55.33,21.99 55.36,21.99 55.38,22 55.38,22 55.39,22.01 56.1,22.01 56.14,22.05 56.77,22.05 56.85,21.96 ; 54.64,21.66 54.44,21.86 54.16,21.86 ; v1(51.41,24.75) 51.26,24.91 50.91,24.91 50.56,24.56 49.81,24.56 ; 48.24,24.73 48.58,24.39 48.99,24.39 49.33,24.73 ; 54.16,21.86 50.1,21.86 49.98,21.98 48.87,21.98 48.86,21.99 48.13,21.99 48.06,21.91 47.75,21.91 47.67,21.99 47.45,21.99 ; 55.23,23.29 55.23,23.29 ; 55.23,23.29 52.68,23.29 52.19,23.78 ; 56.67,24.55 56.14,24.55 55.83,24.24 55.83,24.22 55.79,24.17 ; 56.8,28.18 56.37,27.75 56.01,27.75 56.01,27.72 55.69,27.4 55.35,27.4 55.19,27.56 54.12,27.56 ; 55.56,25.21 55.56,25.24 ; 55.27,19.9 55.23,19.94 55.09,19.94 55.05,19.9 ; 47.45,21.99 47.68,21.76 48.32,21.76 48.55,21.99 ; 52.19,23.78 49.15,23.78 48.99,23.94 48.68,23.94 48.45,23.71 48.18,23.71 47.8,24.09 47.51,24.09 47.35,23.94
  BOTTOM w0.254: U3.D9 58.94,16.18 58.94,15.63 U4.C1 58.87,15.44 59.49,15.44 v1(59.57,15.36) ; C57.1 v1(60.81,22.7) ; U4.R9 51.88,25.63 v1(51.88,25.74) ; U3.H2 v1(53.61,19.1) ; U3.B2 v1(53.61,15.1) ; U3.G7 v1(56.7,19.21) ; U3.A8 v1(58.01,13.33) ; U3.F1 51.22,17.9 v1(51.09,17.77) ; U3.A1 v1(52.81,13.5) ; U3.D2 v1(53.61,16.7) ; v1(51.41,24.75) 51.41,24.5 U4.N9 ; U4.K8 v1(53.6,20.71) ; v1(60.81,20.41) C51.1 C49.1 ; v1(60.81,24.6) 60.94,24.48 C45.1 ; U4.R1 v1(59.21,25.5) ; v1(60.14,17.4) 60.1,17.4 60.07,17.36 59.94,17.36 59.07,17.36 U3.E9 ; v1(59.52,20.01) 59.32,20.01 58.81,19.5 U3.H9 ; U4.K2 v1(58.4,20.71) ; v1(61.48,14.57) v1(61.48,15.59) C48.1 v1(61.48,16.6) C47.1 C50.1 ; v1(51.67,15.5) U4.C9 ; U4.N1 v1(59.21,23.9)
  vias: v1(20.56,30.77) v1(20.56,30.16) v1(20.56,29.53) v1(21.33,30.77) v1(21.33,30.16) v1(21.33,29.53)
